# Allegro board PMOD2BNC.brd
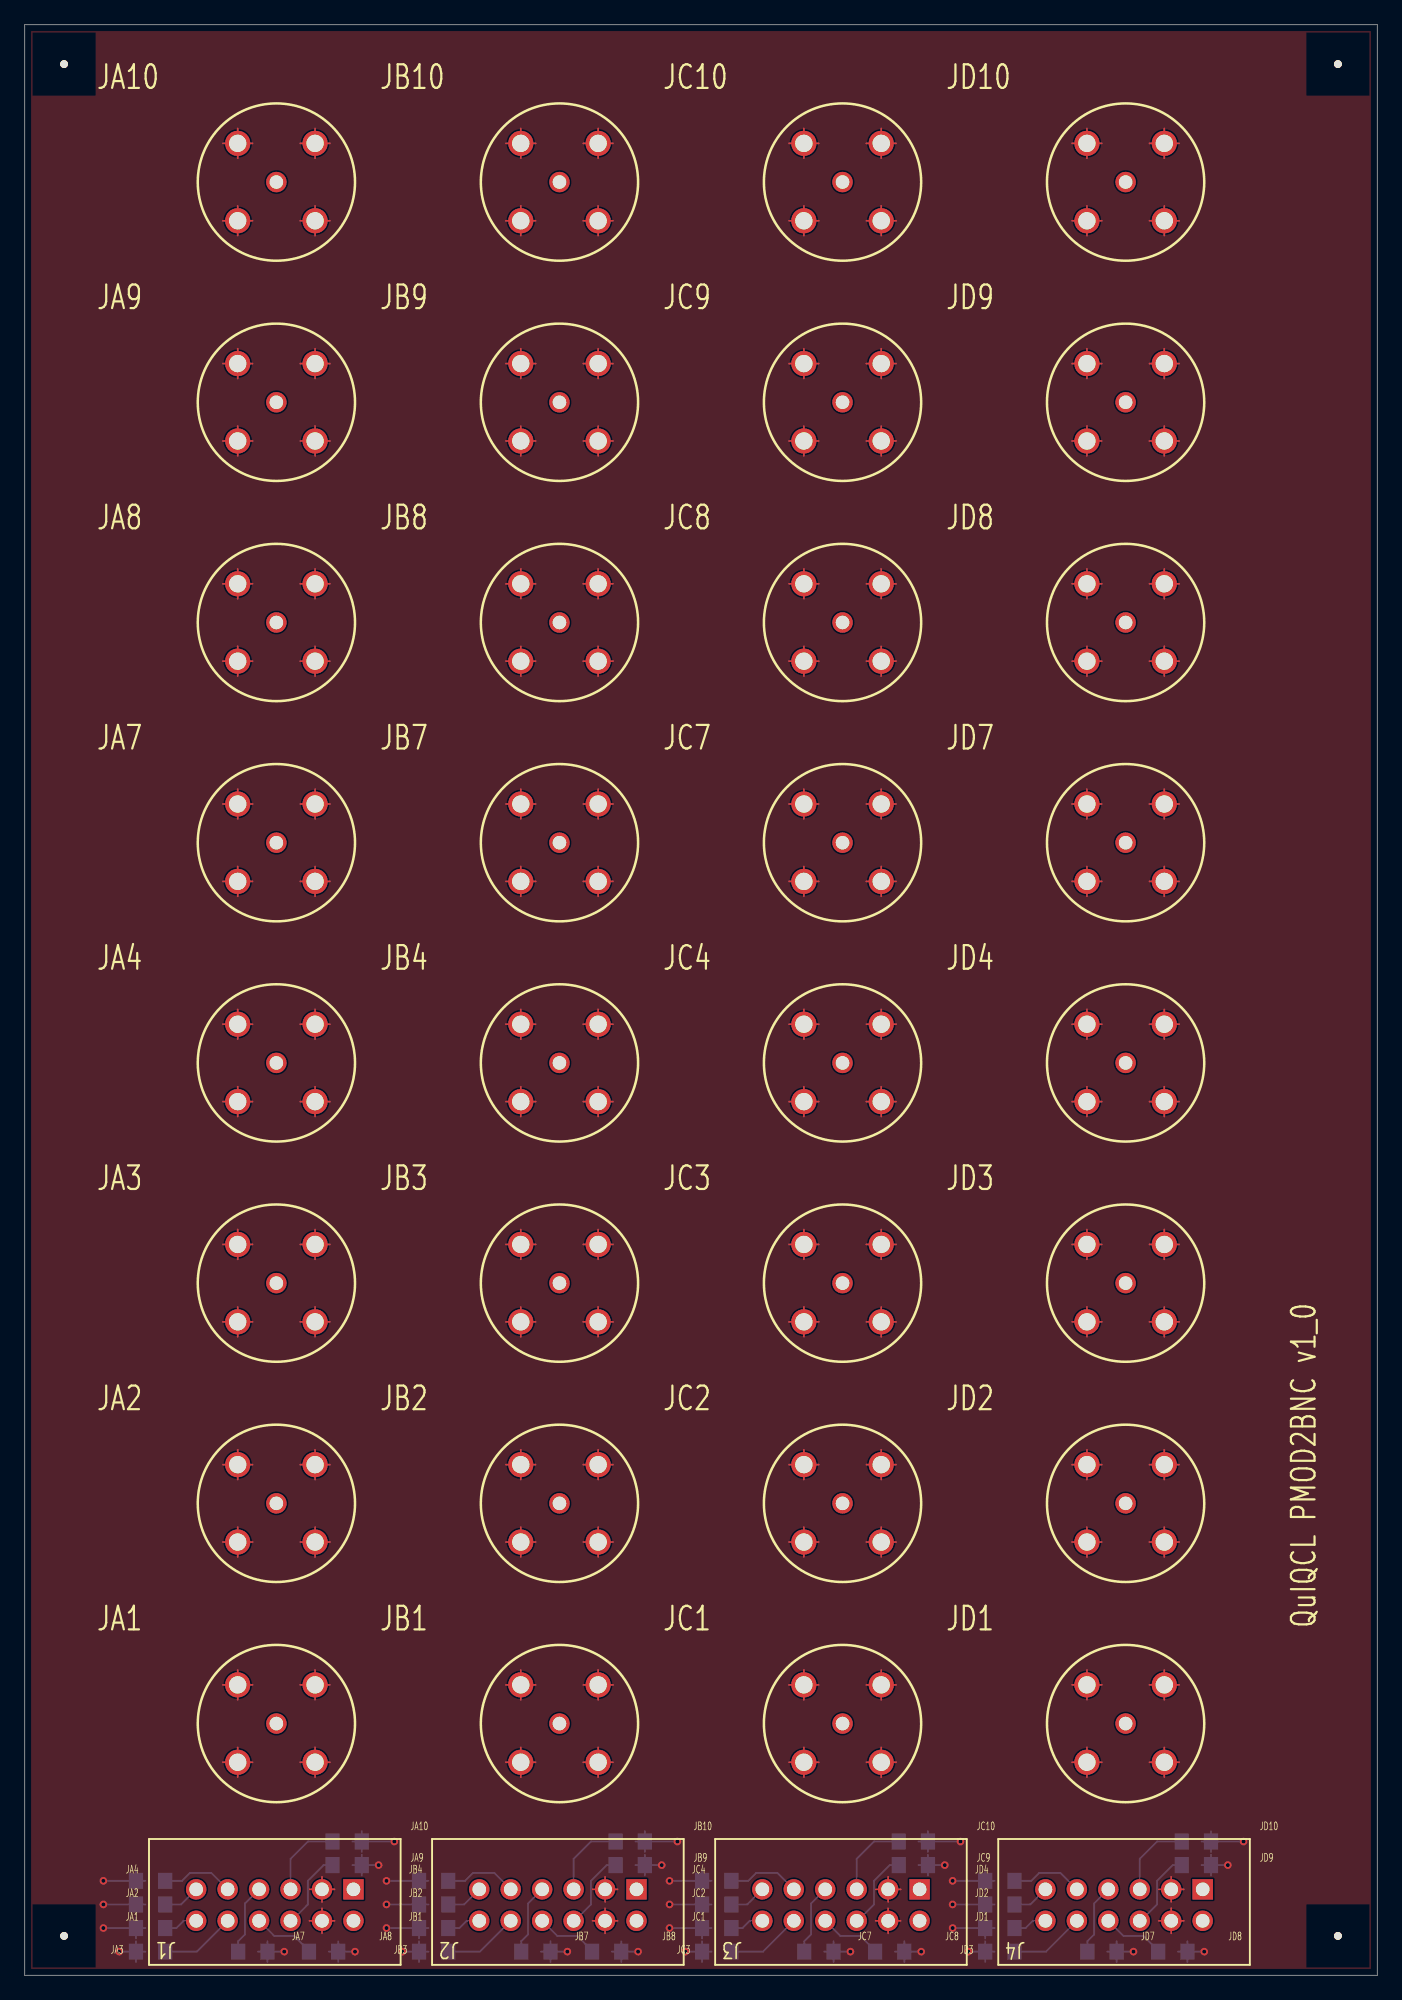
[diagram p0: board, top side]
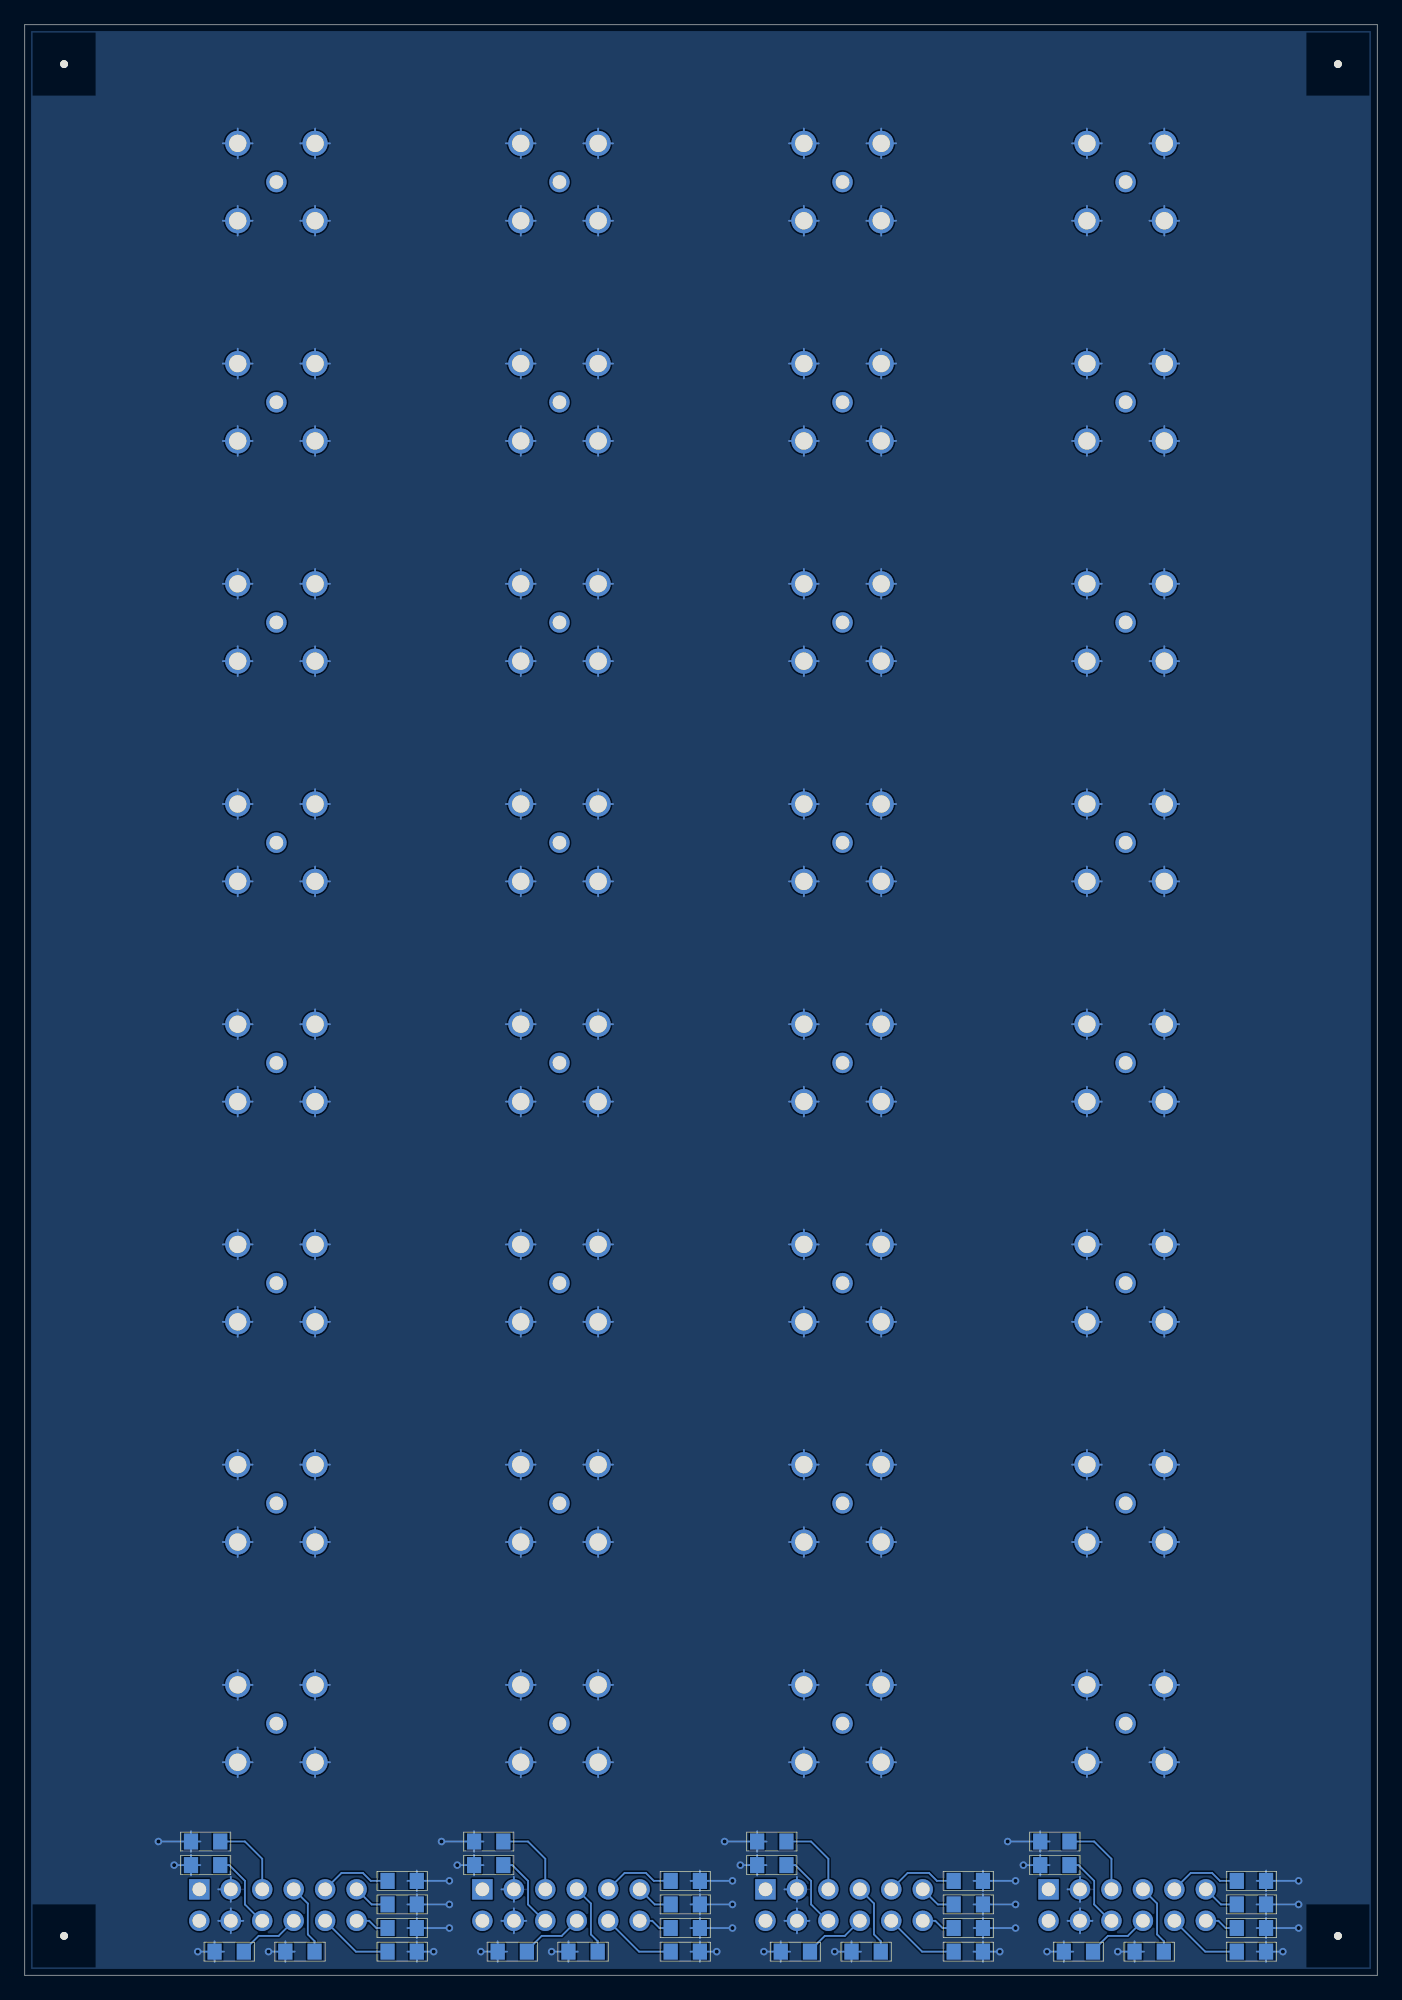
[diagram p1: board, bottom side, seen from below]

Outline 109.22 x 157.48 mm; copper layers: TOP, SIGNAL, GND, BOTTOM. Coordinates in mm from the lower left corner of the outline.
Outline path: 0,157.48 109.22,157.48 109.22,0 0,0 0,157.48

## Design rules (mm)
constraint set DEFAULT: min track width 0.127

## Placement (name value [footprint] x y rotation side)
BNC1  -  [MP-13-22-1]  20.32 20.32 0 top
BNC2  -  [MP-13-22-1]  20.32 38.1 0 top
BNC3  -  [MP-13-22-1]  20.32 55.88 0 top
BNC4  -  [MP-13-22-1]  20.32 73.66 0 top
BNC5  -  [MP-13-22-1]  20.32 91.44 0 top
BNC6  -  [MP-13-22-1]  20.32 109.22 0 top
BNC7  -  [MP-13-22-1]  20.32 127 0 top
BNC8  -  [MP-13-22-1]  20.32 144.78 0 top
BNC9  -  [MP-13-22-1]  43.18 20.32 0 top
BNC10  -  [MP-13-22-1]  43.18 38.1 0 top
BNC11  -  [MP-13-22-1]  43.18 55.88 0 top
BNC12  -  [MP-13-22-1]  43.18 73.66 0 top
BNC13  -  [MP-13-22-1]  43.18 91.44 0 top
BNC14  -  [MP-13-22-1]  43.18 109.22 0 top
BNC15  -  [MP-13-22-1]  43.18 127 0 top
BNC16  -  [MP-13-22-1]  43.18 144.78 0 top
BNC17  -  [MP-13-22-1]  66.04 20.32 0 top
BNC18  -  [MP-13-22-1]  66.04 38.1 0 top
BNC19  -  [MP-13-22-1]  66.04 55.88 0 top
BNC20  -  [MP-13-22-1]  66.04 73.66 0 top
BNC21  -  [MP-13-22-1]  66.04 91.44 0 top
BNC22  -  [MP-13-22-1]  66.04 109.22 0 top
BNC23  -  [MP-13-22-1]  66.04 127 0 top
BNC24  -  [MP-13-22-1]  66.04 144.78 0 top
BNC25  -  [MP-13-22-1]  88.9 20.32 0 top
BNC26  -  [MP-13-22-1]  88.9 38.1 0 top
BNC27  -  [MP-13-22-1]  88.9 55.88 0 top
BNC28  -  [MP-13-22-1]  88.9 73.66 0 top
BNC29  -  [MP-13-22-1]  88.9 91.44 0 top
BNC30  -  [MP-13-22-1]  88.9 109.22 0 top
BNC31  -  [MP-13-22-1]  88.9 127 0 top
BNC32  -  [MP-13-22-1]  88.9 144.78 0 top
J1  71764_0114  [717640112]  10.03 0.84 180 top
J2  71764_0114  [717640112]  32.89 0.84 180 top
J3  71764_0114  [717640112]  55.75 0.84 180 top
J4  71764_0114  [717640112]  78.61 0.84 180 top
NOREF  -  [unnamed]  106.05 3.17 0 top
NOREF#2  -  [unnamed]  106.05 154.31 0 top
NOREF#3  -  [unnamed]  3.17 3.17 0 top
NOREF#4  -  [unnamed]  3.17 154.31 0 top
R1  -  [RES_0805]  10.16 3.81 180 bottom
R2  -  [RES_0805]  10.16 5.71 180 bottom
R3  -  [RES_0805]  10.16 1.91 180 bottom
R4  -  [RES_0805]  10.16 7.62 180 bottom
R5  -  [RES_0805]  18.41 1.91 0 bottom
R6  -  [RES_0805]  24.13 1.91 0 bottom
R7  -  [RES_0805]  26.04 8.89 0 bottom
R8  -  [RES_0805]  26.04 10.79 0 bottom
R9  -  [RES_0805]  33.02 3.81 180 bottom
R10  -  [RES_0805]  33.02 5.71 180 bottom
R11  -  [RES_0805]  33.02 1.91 180 bottom
R12  -  [RES_0805]  33.02 7.62 180 bottom
R13  -  [RES_0805]  41.27 1.91 0 bottom
R14  -  [RES_0805]  46.99 1.91 0 bottom
R15  -  [RES_0805]  48.9 8.89 0 bottom
R16  -  [RES_0805]  48.9 10.79 0 bottom
R17  -  [RES_0805]  55.88 3.81 180 bottom
R18  -  [RES_0805]  55.88 5.71 180 bottom
R19  -  [RES_0805]  55.88 1.91 180 bottom
R20  -  [RES_0805]  55.88 7.62 180 bottom
R21  -  [RES_0805]  64.14 1.91 0 bottom
R22  -  [RES_0805]  69.85 1.91 0 bottom
R23  -  [RES_0805]  71.75 8.89 0 bottom
R24  -  [RES_0805]  71.75 10.79 0 bottom
R25  -  [RES_0805]  78.74 3.81 180 bottom
R26  -  [RES_0805]  78.74 5.71 180 bottom
R27  -  [RES_0805]  78.74 1.91 180 bottom
R28  -  [RES_0805]  78.74 7.62 180 bottom
R29  -  [RES_0805]  87 1.91 0 bottom
R30  -  [RES_0805]  92.71 1.91 0 bottom
R31  -  [RES_0805]  94.61 8.89 0 bottom
R32  -  [RES_0805]  94.61 10.79 0 bottom

## Library data of the parts
BNC1-BNC32 = MP-13-22-1
J1-J4 = 71764_0114
R1-R7 R9-R32 = RES_0805
R8 = RES_0805: signal model: R50_withpkg

## Footprints (pads in the part's own frame, mm; a bottom-side part is the same pattern mirrored in y, then rotated)
717640112
  rect 1.651x1.651 hole 1.1: 1(-16.51,-6.096)
  round 1.651 hole 1.1: 2(-16.51,-3.556) 3(-13.97,-6.096) 4(-13.97,-3.556) 5(-11.43,-6.096) 6(-11.43,-3.556) 7(-8.89,-6.096) 8(-8.89,-3.556) 9(-6.35,-6.096) 10(-6.35,-3.556) 11(-3.81,-6.096) 12(-3.81,-3.556)
MP-13-22-1
  round 2.032 hole 1.397: 1(3.124,3.124) 2(3.124,-3.124) 3(-3.124,-3.124) 4(-3.124,3.124)
  round 1.651 hole 1.092: 5(0,0)
RES_0805
  rect 1.151x1.3 smd: 1(1.181,0) 2(-1.181,0)
unnamed
  round 0.635 hole 3.175 unplated: (0,0)

## Nets
GND: BNC1.1 BNC1.2 BNC1.3 BNC1.4 BNC2.1 BNC2.2 BNC2.3 BNC2.4 BNC3.1 BNC3.2 BNC3.3 BNC3.4 BNC4.1 BNC4.2 BNC4.3 BNC4.4 BNC5.1 BNC5.2 BNC5.3 BNC5.4 BNC6.1 BNC6.2 BNC6.3 BNC6.4 BNC7.1 BNC7.2 BNC7.3 BNC7.4 BNC8.1 BNC8.2 BNC8.3 BNC8.4 BNC9.1 BNC9.2 BNC9.3 BNC9.4 BNC10.1 BNC10.2 BNC10.3 BNC10.4 BNC11.1 BNC11.2 BNC11.3 BNC11.4 BNC12.1 BNC12.2 BNC12.3 BNC12.4 BNC13.1 BNC13.2 BNC13.3 BNC13.4 BNC14.1 BNC14.2 BNC14.3 BNC14.4 BNC15.1 BNC15.2 BNC15.3 BNC15.4 BNC16.1 BNC16.2 BNC16.3 BNC16.4 BNC17.1 BNC17.2 BNC17.3 BNC17.4 BNC18.1 BNC18.2 BNC18.3 BNC18.4 BNC19.1 BNC19.2 BNC19.3 BNC19.4 BNC20.1 BNC20.2 BNC20.3 BNC20.4 BNC21.1 BNC21.2 BNC21.3 BNC21.4 BNC22.1 BNC22.2 BNC22.3 BNC22.4 BNC23.1 BNC23.2 BNC23.3 BNC23.4 BNC24.1 BNC24.2 BNC24.3 BNC24.4 BNC25.1 BNC25.2 BNC25.3 BNC25.4 BNC26.1 BNC26.2 BNC26.3 BNC26.4 BNC27.1 BNC27.2 BNC27.3 BNC27.4 BNC28.1 BNC28.2 BNC28.3 BNC28.4 BNC29.1 BNC29.2 BNC29.3 BNC29.4 BNC30.1 BNC30.2 BNC30.3 BNC30.4 BNC31.1 BNC31.2 BNC31.3 BNC31.4 BNC32.1 BNC32.2 BNC32.3 BNC32.4 J1.3 J1.4 J2.3 J2.4 J3.3 J3.4 J4.3 J4.4 R1.1 R2.1 R3.1 R4.1 R5.1 R6.1 R7.1 R8.1 R9.1 R10.1 R11.1 R12.1 R13.1 R14.1 R15.1 R16.1 R17.1 R18.1 R19.1 R20.1 R21.1 R22.1 R23.1 R24.1 R25.1 R26.1 R27.1 R28.1 R29.1 R30.1 R31.1 R32.1
N08480: BNC1.5(IO) J1.12 R1.2
N08489: BNC2.5(IO) J1.10 R3.2
N08507: BNC3.5(IO) J1.7 R5.2
N08519: BNC4.5(IO) J1.6 R7.2
N08544: BNC5.5(IO) J1.11 R2.2
N08556: BNC6.5(IO) J1.9 R4.2
N08588: BNC7.5(IO) J1.8 R6.2
N08600: BNC8.5(IO) J1.5 R8.2
N13592: BNC9.5(IO) J2.12 R9.2
N13596: BNC10.5(IO) J2.10 R11.2
N13604: BNC11.5(IO) J2.7 R13.2
N13610: BNC12.5(IO) J2.6 R15.2
N13620: BNC13.5(IO) J2.11 R10.2
N13626: BNC14.5(IO) J2.9 R12.2
N13636: BNC15.5(IO) J2.8 R14.2
N13642: BNC16.5(IO) J2.5 R16.2
N14473: BNC17.5(IO) J3.12 R17.2
N14477: BNC18.5(IO) J3.10 R19.2
N14485: BNC19.5(IO) J3.7 R21.2
N14491: BNC20.5(IO) J3.6 R23.2
N14501: BNC21.5(IO) J3.11 R18.2
N14507: BNC22.5(IO) J3.9 R20.2
N14517: BNC23.5(IO) J3.8 R22.2
N14523: BNC24.5(IO) J3.5 R24.2
N15354: BNC25.5(IO) J4.12 R25.2
N15358: BNC26.5(IO) J4.10 R27.2
N15366: BNC27.5(IO) J4.7 R29.2
N15372: BNC28.5(IO) J4.6 R31.2
N15382: BNC29.5(IO) J4.11 R26.2
N15388: BNC30.5(IO) J4.9 R28.2
N15398: BNC31.5(IO) J4.8 R30.2
N15404: BNC32.5(IO) J4.5 R32.2

Pads without a net: J1 1 2; J2 1 2; J3 1 2; J4 1 2

## Via types
v1: diameter 0.61, hole 0.33, TOP to BOTTOM, 32 vias

## Routing (per net, layer and track width the routed paths; a pad name or vN(x,y) marks a point on that pad's centre or on a via; arc(x,y) is an arc through that point)
GND: length 2075.7
  TOP w0.127: 90.83,52.76 BNC27.2 ; BNC27.2 93.22,52.76 ; BNC27.2 92.02,53.95 ; BNC27.2 92.02,51.56 ; BNC32.4 86.97,147.9 ; BNC32.4 84.58,147.9 ; BNC32.4 85.78,146.71 ; BNC32.4 85.78,149.1 ; 61.72,76.78 BNC20.4 ; BNC20.4 62.92,77.98 ; BNC20.4 62.92,75.59 ; BNC20.4 64.11,76.78 ; 16,141.66 BNC8.3 ; BNC8.3 17.2,140.46 ; BNC8.3 17.2,142.85 ; BNC8.3 18.39,141.66 ; 38.86,123.88 BNC15.3 ; BNC15.3 41.25,123.88 ; BNC15.3 40.06,122.68 ; BNC15.3 40.06,125.07 ; 69.72,5.93 J3.3 ; J3.3 68.71,6.93 ; J3.3 70.73,6.93 ; J3.3 69.72,7.94 ; 23.44,22.25 BNC1.1 ; BNC1.1 23.44,24.64 ; BNC1.1 24.64,23.44 ; BNC1.1 22.25,23.44 ; 61.72,52.76 BNC19.3 ; BNC19.3 64.11,52.76 ; BNC19.3 62.92,53.95 ; BNC19.3 62.92,51.56 ; 45.11,23.44 BNC9.1 ; BNC9.1 47.5,23.44 ; BNC9.1 46.3,22.25 ; BNC9.1 46.3,24.64 ; 69.72,3.39 J3.4 ; J3.4 70.73,4.39 ; J3.4 68.71,4.39 ; J3.4 69.72,5.4 ; 92.02,40.03 BNC26.1 ; BNC26.1 90.83,41.22 ; BNC26.1 93.22,41.22 ; BNC26.1 92.02,42.42 ; BNC24.2 69.16,142.85 ; BNC24.2 69.16,140.46 ; BNC24.2 70.36,141.66 ; BNC24.2 67.97,141.66 ; BNC32.3 85.78,142.85 ; BNC32.3 86.97,141.66 ; BNC32.3 84.58,141.66 ; BNC32.3 85.78,140.46 ; 69.16,40.03 BNC18.1 ; BNC18.1 69.16,42.42 ; BNC18.1 70.36,41.22 ; BNC18.1 67.97,41.22 ; BNC2.4 17.2,42.42 ; BNC2.4 18.39,41.22 ; BNC2.4 17.2,40.03 ; BNC2.4 16,41.22 ; 46.86,3.39 J2.4 ; J2.4 47.87,4.39 ; J2.4 45.85,4.39 ; J2.4 46.86,5.4 ; 90.83,106.1 BNC30.2 ; BNC30.2 92.02,107.29 ; BNC30.2 93.22,106.1 ; BNC30.2 92.02,104.9 ; BNC29.2 93.22,88.32 ; BNC29.2 92.02,89.51 ; BNC29.2 92.02,87.12 ; BNC29.2 90.83,88.32 ; BNC2.1 23.44,42.42 ; BNC2.1 23.44,40.03 ; BNC2.1 22.25,41.22 ; BNC2.1 24.64,41.22 ; 62.92,87.12 BNC21.3 ; BNC21.3 64.11,88.32 ; BNC21.3 61.72,88.32 ; BNC21.3 62.92,89.51 ; BNC20.3 64.11,70.54 ; BNC20.3 61.72,70.54 ; BNC20.3 62.92,71.73 ; BNC20.3 62.92,69.34 ; BNC14.4 41.25,112.34 ; BNC14.4 40.06,113.54 ; BNC14.4 38.86,112.34 ; BNC14.4 40.06,111.15 ; BNC31.3 85.78,125.07 ; BNC31.3 86.97,123.88 ; BNC31.3 84.58,123.88 ; BNC31.3 85.78,122.68 ; 61.72,94.56 BNC21.4 ; BNC21.4 62.92,93.37 ; BNC21.4 64.11,94.56 ; BNC21.4 62.92,95.76 ; BNC22.4 64.11,112.34 ; BNC22.4 61.72,112.34 ; BNC22.4 62.92,111.15 ; BNC22.4 62.92,113.54 ; BNC11.3 40.06,53.95 ; BNC11.3 40.06,51.56 ; BNC11.3 41.25,52.76 ; BNC11.3 38.86,52.76 ; 23.44,16 BNC1.2 ; BNC1.2 24.64,17.2 ; BNC1.2 22.25,17.2 ; BNC1.2 23.44,18.39 ; J1.4 25.01,4.39 ; J1.4 24,5.4 ; J1.4 24,3.39 ; J1.4 22.99,4.39 ; BNC21.2 70.36,88.32 ; BNC21.2 69.16,89.51 ; BNC21.2 69.16,87.12 ; BNC21.2 67.97,88.32 ; 62.92,104.9 BNC22.3 ; BNC22.3 61.72,106.1 ; BNC22.3 64.11,106.1 ; BNC22.3 62.92,107.29 ; 45.11,59 BNC11.1 ; BNC11.1 46.3,60.2 ; BNC11.1 47.5,59 ; BNC11.1 46.3,57.81 ; 85.78,75.59 BNC28.4 ; BNC28.4 86.97,76.78 ; BNC28.4 84.58,76.78 ; BNC28.4 85.78,77.98 ; 40.06,146.71 BNC16.4 ; BNC16.4 41.25,147.9 ; BNC16.4 38.86,147.9 ; BNC16.4 40.06,149.1 ; BNC11.2 46.3,53.95 ; BNC11.2 47.5,52.76 ; BNC11.2 46.3,51.56 ; BNC11.2 45.11,52.76 ; 85.78,104.9 BNC30.3 ; BNC30.3 85.78,107.29 ; BNC30.3 86.97,106.1 ; BNC30.3 84.58,106.1 ; BNC9.2 47.5,17.2 ; BNC9.2 45.11,17.2 ; BNC9.2 46.3,16 ; BNC9.2 46.3,18.39 ; 16,112.34 BNC6.4 ; BNC6.4 17.2,113.54 ; BNC6.4 18.39,112.34 ; BNC6.4 17.2,111.15 ; BNC25.4 85.78,24.64 ; BNC25.4 86.97,23.44 ; BNC25.4 85.78,22.25 ; BNC25.4 84.58,23.44 ; 17.2,16 BNC1.3 ; BNC1.3 16,17.2 ; BNC1.3 17.2,18.39 ; BNC1.3 18.39,17.2 ; 92.02,75.59 BNC28.1 ; BNC28.1 92.02,77.98 ; BNC28.1 90.83,76.78 ; BNC28.1 93.22,76.78 ; 22.25,34.98 BNC2.2 ; BNC2.2 23.44,33.78 ; BNC2.2 24.64,34.98 ; BNC2.2 23.44,36.17 ; BNC29.3 85.78,89.51 ; BNC29.3 84.58,88.32 ; BNC29.3 85.78,87.12 ; BNC29.3 86.97,88.32 ; 62.92,16 BNC17.3 ; BNC17.3 61.72,17.2 ; BNC17.3 64.11,17.2 ; BNC17.3 62.92,18.39 ; J2.3 46.86,7.94 ; J2.3 45.85,6.93 ; J2.3 47.87,6.93 ; J2.3 46.86,5.93 ; 40.06,33.78 BNC10.3 ; BNC10.3 40.06,36.17 ; BNC10.3 38.86,34.98 ; BNC10.3 41.25,34.98 ; BNC25.2 93.22,17.2 ; BNC25.2 92.02,16 ; BNC25.2 92.02,18.39 ; BNC25.2 90.83,17.2 ; 84.58,59 BNC27.4 ; BNC27.4 85.78,57.81 ; BNC27.4 86.97,59 ; BNC27.4 85.78,60.2 ; BNC23.3 62.92,125.07 ; BNC23.3 62.92,122.68 ; BNC23.3 64.11,123.88 ; BNC23.3 61.72,123.88 ; BNC8.2 23.44,142.85 ; BNC8.2 24.64,141.66 ; BNC8.2 22.25,141.66 ; BNC8.2 23.44,140.46 ; BNC24.1 70.36,147.9 ; BNC24.1 69.16,146.71 ; BNC24.1 69.16,149.1 ; BNC24.1 67.97,147.9 ; BNC32.1 93.22,147.9 ; BNC32.1 90.83,147.9 ; BNC32.1 92.02,149.1 ; BNC32.1 92.02,146.71 ; BNC26.2 93.22,34.98 ; BNC26.2 92.02,36.17 ; BNC26.2 90.83,34.98 ; BNC26.2 92.02,33.78 ; 84.58,130.12 BNC31.4 ; BNC31.4 85.78,131.32 ; BNC31.4 86.97,130.12 ; BNC31.4 85.78,128.93 ; 61.72,147.9 BNC24.4 ; BNC24.4 62.92,146.71 ; BNC24.4 62.92,149.1 ; BNC24.4 64.11,147.9 ; BNC9.4 41.25,23.44 ; BNC9.4 40.06,24.64 ; BNC9.4 40.06,22.25 ; BNC9.4 38.86,23.44 ; 23.44,57.81 BNC3.1 ; BNC3.1 23.44,60.2 ; BNC3.1 24.64,59 ; BNC3.1 22.25,59 ; 16,52.76 BNC3.3 ; BNC3.3 17.2,51.56 ; BNC3.3 17.2,53.95 ; BNC3.3 18.39,52.76 ; 92.02,122.68 BNC31.2 ; BNC31.2 90.83,123.88 ; BNC31.2 92.02,125.07 ; BNC31.2 93.22,123.88 ; BNC8.1 24.64,147.9 ; BNC8.1 23.44,146.71 ; BNC8.1 22.25,147.9 ; BNC8.1 23.44,149.1 ; 22.25,94.56 BNC5.1 ; BNC5.1 24.64,94.56 ; BNC5.1 23.44,93.37 ; BNC5.1 23.44,95.76 ; 40.06,93.37 BNC13.4 ; BNC13.4 38.86,94.56 ; BNC13.4 40.06,95.76 ; BNC13.4 41.25,94.56 ; BNC7.2 24.64,123.88 ; BNC7.2 22.25,123.88 ; BNC7.2 23.44,125.07 ; BNC7.2 23.44,122.68 ; 22.25,106.1 BNC6.2 ; BNC6.2 24.64,106.1 ; BNC6.2 23.44,104.9 ; BNC6.2 23.44,107.29 ; 61.72,34.98 BNC18.3 ; BNC18.3 62.92,33.78 ; BNC18.3 62.92,36.17 ; BNC18.3 64.11,34.98 ; BNC6.1 24.64,112.34 ; BNC6.1 22.25,112.34 ; BNC6.1 23.44,111.15 ; BNC6.1 23.44,113.54 ; 40.06,140.46 BNC16.3 ; BNC16.3 38.86,141.66 ; BNC16.3 41.25,141.66 ; BNC16.3 40.06,142.85 ; BNC10.4 41.25,41.22 ; BNC10.4 38.86,41.22 ; BNC10.4 40.06,40.03 ; BNC10.4 40.06,42.42 ; BNC18.4 62.92,42.42 ; BNC18.4 64.11,41.22 ; BNC18.4 62.92,40.03 ; BNC18.4 61.72,41.22 ; 45.11,41.22 BNC10.1 ; BNC10.1 46.3,40.03 ; BNC10.1 47.5,41.22 ; BNC10.1 46.3,42.42 ; 45.11,112.34 BNC14.1 ; BNC14.1 47.5,112.34 ; BNC14.1 46.3,111.15 ; BNC14.1 46.3,113.54 ; 46.3,75.59 BNC12.1 ; BNC12.1 46.3,77.98 ; BNC12.1 45.11,76.78 ; BNC12.1 47.5,76.78 ; BNC5.2 23.44,89.51 ; BNC5.2 24.64,88.32 ; BNC5.2 23.44,87.12 ; BNC5.2 22.25,88.32 ; BNC9.3 40.06,18.39 ; BNC9.3 40.06,16 ; BNC9.3 38.86,17.2 ; BNC9.3 41.25,17.2 ; BNC18.2 69.16,36.17 ; BNC18.2 67.97,34.98 ; BNC18.2 69.16,33.78 ; BNC18.2 70.36,34.98 ; 67.97,130.12 BNC23.1 ; BNC23.1 70.36,130.12 ; BNC23.1 69.16,131.32 ; BNC23.1 69.16,128.93 ; BNC20.2 70.36,70.54 ; BNC20.2 69.16,69.34 ; BNC20.2 67.97,70.54 ; BNC20.2 69.16,71.73 ; BNC16.2 46.3,142.85 ; BNC16.2 47.5,141.66 ; BNC16.2 45.11,141.66 ; BNC16.2 46.3,140.46 ; 40.06,69.34 BNC12.3 ; BNC12.3 40.06,71.73 ; BNC12.3 38.86,70.54 ; BNC12.3 41.25,70.54 ; 45.11,94.56 BNC13.1 ; BNC13.1 47.5,94.56 ; BNC13.1 46.3,95.76 ; BNC13.1 46.3,93.37 ; 91.57,6.93 J4.3 ; J4.3 92.58,5.93 ; J4.3 93.59,6.93 ; J4.3 92.58,7.94 ; 45.11,123.88 BNC15.2 ; BNC15.2 46.3,122.68 ; BNC15.2 47.5,123.88 ; BNC15.2 46.3,125.07 ; BNC4.3 17.2,71.73 ; BNC4.3 17.2,69.34 ; BNC4.3 16,70.54 ; BNC4.3 18.39,70.54 ; 90.83,59 BNC27.1 ; BNC27.1 93.22,59 ; BNC27.1 92.02,57.81 ; BNC27.1 92.02,60.2 ; 61.72,59 BNC19.4 ; BNC19.4 62.92,60.2 ; BNC19.4 62.92,57.81 ; BNC19.4 64.11,59 ; BNC24.3 62.92,142.85 ; BNC24.3 64.11,141.66 ; BNC24.3 61.72,141.66 ; BNC24.3 62.92,140.46 ; BNC26.3 85.78,36.17 ; BNC26.3 84.58,34.98 ; BNC26.3 85.78,33.78 ; BNC26.3 86.97,34.98 ; 22.25,70.54 BNC4.2 ; BNC4.2 24.64,70.54 ; BNC4.2 23.44,71.73 ; BNC4.2 23.44,69.34 ; BNC14.3 40.06,107.29 ; BNC14.3 40.06,104.9 ; BNC14.3 38.86,106.1 ; BNC14.3 41.25,106.1 ; BNC31.1 92.02,131.32 ; BNC31.1 93.22,130.12 ; BNC31.1 90.83,130.12 ; BNC31.1 92.02,128.93 ; BNC13.2 46.3,89.51 ; BNC13.2 46.3,87.12 ; BNC13.2 45.11,88.32 ; BNC13.2 47.5,88.32 ; 40.06,57.81 BNC11.4 ; BNC11.4 38.86,59 ; BNC11.4 41.25,59 ; BNC11.4 40.06,60.2 ; 46.3,104.9 BNC14.2 ; BNC14.2 45.11,106.1 ; BNC14.2 46.3,107.29 ; BNC14.2 47.5,106.1 ; BNC8.4 18.39,147.9 ; BNC8.4 17.2,146.71 ; BNC8.4 16,147.9 ; BNC8.4 17.2,149.1 ; BNC23.2 70.36,123.88 ; BNC23.2 69.16,125.07 ; BNC23.2 69.16,122.68 ; BNC23.2 67.97,123.88 ; J4.4 93.59,4.39 ; J4.4 92.58,5.4 ; J4.4 92.58,3.39 ; J4.4 91.57,4.39 ; 69.16,16 BNC17.2 ; BNC17.2 70.36,17.2 ; BNC17.2 67.97,17.2 ; BNC17.2 69.16,18.39 ; BNC19.2 69.16,53.95 ; BNC19.2 70.36,52.76 ; BNC19.2 69.16,51.56 ; BNC19.2 67.97,52.76 ; 69.16,75.59 BNC20.1 ; BNC20.1 67.97,76.78 ; BNC20.1 70.36,76.78 ; BNC20.1 69.16,77.98 ; BNC32.2 92.02,142.85 ; BNC32.2 93.22,141.66 ; BNC32.2 90.83,141.66 ; BNC32.2 92.02,140.46 ; 69.16,93.37 BNC21.1 ; BNC21.1 67.97,94.56 ; BNC21.1 70.36,94.56 ; BNC21.1 69.16,95.76 ; BNC19.1 69.16,60.2 ; BNC19.1 69.16,57.81 ; BNC19.1 70.36,59 ; BNC19.1 67.97,59 ; BNC28.3 85.78,71.73 ; BNC28.3 84.58,70.54 ; BNC28.3 85.78,69.34 ; BNC28.3 86.97,70.54 ; BNC13.3 40.06,89.51 ; BNC13.3 41.25,88.32 ; BNC13.3 40.06,87.12 ; BNC13.3 38.86,88.32 ; 85.78,93.37 BNC29.4 ; BNC29.4 86.97,94.56 ; BNC29.4 85.78,95.76 ; BNC29.4 84.58,94.56 ; J1.3 24,7.94 ; J1.3 25.01,6.93 ; J1.3 24,5.93 ; J1.3 22.99,6.93 ; 84.58,41.22 BNC26.4 ; BNC26.4 86.97,41.22 ; BNC26.4 85.78,40.03 ; BNC26.4 85.78,42.42 ; BNC12.4 41.25,76.78 ; BNC12.4 40.06,77.98 ; BNC12.4 40.06,75.59 ; BNC12.4 38.86,76.78 ; BNC5.4 17.2,95.76 ; BNC5.4 16,94.56 ; BNC5.4 18.39,94.56 ; BNC5.4 17.2,93.37 ; 46.3,146.71 BNC16.1 ; BNC16.1 47.5,147.9 ; BNC16.1 46.3,149.1 ; BNC16.1 45.11,147.9 ; BNC7.3 18.39,123.88 ; BNC7.3 17.2,125.07 ; BNC7.3 16,123.88 ; BNC7.3 17.2,122.68 ; BNC25.1 92.02,24.64 ; BNC25.1 92.02,22.25 ; BNC25.1 90.83,23.44 ; BNC25.1 93.22,23.44 ; BNC29.1 92.02,95.76 ; BNC29.1 90.83,94.56 ; BNC29.1 92.02,93.37 ; BNC29.1 93.22,94.56 ; BNC15.4 41.25,130.12 ; BNC15.4 40.06,128.93 ; BNC15.4 40.06,131.32 ; BNC15.4 38.86,130.12 ; BNC30.4 86.97,112.34 ; BNC30.4 85.78,113.54 ; BNC30.4 84.58,112.34 ; BNC30.4 85.78,111.15 ; BNC4.1 23.44,77.98 ; BNC4.1 22.25,76.78 ; BNC4.1 23.44,75.59 ; BNC4.1 24.64,76.78 ; 85.78,16 BNC25.3 ; BNC25.3 85.78,18.39 ; BNC25.3 86.97,17.2 ; BNC25.3 84.58,17.2 ; BNC3.2 23.44,53.95 ; BNC3.2 22.25,52.76 ; BNC3.2 24.64,52.76 ; BNC3.2 23.44,51.56 ; 23.44,128.93 BNC7.1 ; BNC7.1 24.64,130.12 ; BNC7.1 22.25,130.12 ; BNC7.1 23.44,131.32 ; 17.2,33.78 BNC2.3 ; BNC2.3 17.2,36.17 ; BNC2.3 16,34.98 ; BNC2.3 18.39,34.98 ; BNC12.2 46.3,71.73 ; BNC12.2 45.11,70.54 ; BNC12.2 46.3,69.34 ; BNC12.2 47.5,70.54 ; 67.97,112.34 BNC22.1 ; BNC22.1 70.36,112.34 ; BNC22.1 69.16,113.54 ; BNC22.1 69.16,111.15 ; 16,130.12 BNC7.4 ; BNC7.4 18.39,130.12 ; BNC7.4 17.2,128.93 ; BNC7.4 17.2,131.32 ; BNC1.4 18.39,23.44 ; BNC1.4 17.2,22.25 ; BNC1.4 16,23.44 ; BNC1.4 17.2,24.64 ; 69.16,22.25 BNC17.1 ; BNC17.1 67.97,23.44 ; BNC17.1 69.16,24.64 ; BNC17.1 70.36,23.44 ; 16,59 BNC3.4 ; BNC3.4 17.2,60.2 ; BNC3.4 17.2,57.81 ; BNC3.4 18.39,59 ; BNC15.1 47.5,130.12 ; BNC15.1 45.11,130.12 ; BNC15.1 46.3,128.93 ; BNC15.1 46.3,131.32 ; BNC22.2 70.36,106.1 ; BNC22.2 69.16,107.29 ; BNC22.2 69.16,104.9 ; BNC22.2 67.97,106.1 ; 62.92,128.93 BNC23.4 ; BNC23.4 61.72,130.12 ; BNC23.4 64.11,130.12 ; BNC23.4 62.92,131.32 ; 62.92,22.25 BNC17.4 ; BNC17.4 64.11,23.44 ; BNC17.4 62.92,24.64 ; BNC17.4 61.72,23.44 ; BNC28.2 93.22,70.54 ; BNC28.2 92.02,69.34 ; BNC28.2 90.83,70.54 ; BNC28.2 92.02,71.73 ; 45.11,34.98 BNC10.2 ; BNC10.2 46.3,36.17 ; BNC10.2 46.3,33.78 ; BNC10.2 47.5,34.98 ; BNC4.4 17.2,77.98 ; BNC4.4 16,76.78 ; BNC4.4 17.2,75.59 ; BNC4.4 18.39,76.78 ; 17.2,104.9 BNC6.3 ; BNC6.3 16,106.1 ; BNC6.3 17.2,107.29 ; BNC6.3 18.39,106.1 ; 84.58,52.76 BNC27.3 ; BNC27.3 85.78,51.56 ; BNC27.3 86.97,52.76 ; BNC27.3 85.78,53.95 ; 16,88.32 BNC5.3 ; BNC5.3 17.2,87.12 ; BNC5.3 17.2,89.51 ; BNC5.3 18.39,88.32 ; 90.83,112.34 BNC30.1 ; BNC30.1 93.22,112.34 ; BNC30.1 92.02,113.54 ; BNC30.1 92.02,111.15
  GND w0.127: 23.44,122.68 BNC7.2 ; BNC7.2 24.64,123.88 ; BNC7.2 22.25,123.88 ; BNC7.2 23.44,125.07 ; BNC20.1 69.16,77.98 ; BNC20.1 69.16,75.59 ; BNC20.1 67.97,76.78 ; BNC20.1 70.36,76.78 ; BNC4.3 17.2,71.73 ; BNC4.3 18.39,70.54 ; BNC4.3 16,70.54 ; BNC4.3 17.2,69.34 ; 90.83,23.44 BNC25.1 ; BNC25.1 92.02,22.25 ; BNC25.1 93.22,23.44 ; BNC25.1 92.02,24.64 ; 62.92,22.25 BNC17.4 ; BNC17.4 64.11,23.44 ; BNC17.4 61.72,23.44 ; BNC17.4 62.92,24.64 ; 61.72,147.9 BNC24.4 ; BNC24.4 62.92,149.1 ; BNC24.4 64.11,147.9 ; BNC24.4 62.92,146.71 ; 61.72,112.34 BNC22.4 ; BNC22.4 62.92,113.54 ; BNC22.4 62.92,111.15 ; BNC22.4 64.11,112.34 ; 45.85,4.39 J2.4 ; J2.4 47.87,4.39 ; J2.4 46.86,5.4 ; J2.4 46.86,3.39 ; BNC22.1 69.16,113.54 ; BNC22.1 69.16,111.15 ; BNC22.1 70.36,112.34 ; BNC22.1 67.97,112.34 ; BNC17.3 64.11,17.2 ; BNC17.3 61.72,17.2 ; BNC17.3 62.92,18.39 ; BNC17.3 62.92,16 ; 22.25,52.76 BNC3.2 ; BNC3.2 23.44,51.56 ; BNC3.2 23.44,53.95 ; BNC3.2 24.64,52.76 ; 46.3,22.25 BNC9.1 ; BNC9.1 45.11,23.44 ; BNC9.1 46.3,24.64 ; BNC9.1 47.5,23.44 ; 23.44,22.25 BNC1.1 ; BNC1.1 22.25,23.44 ; BNC1.1 23.44,24.64 ; BNC1.1 24.64,23.44 ; BNC5.3 17.2,89.51 ; BNC5.3 18.39,88.32 ; BNC5.3 16,88.32 ; BNC5.3 17.2,87.12 ; BNC2.3 17.2,36.17 ; BNC2.3 18.39,34.98 ; BNC2.3 17.2,33.78 ; BNC2.3 16,34.98 ; BNC15.1 47.5,130.12 ; BNC15.1 45.11,130.12 ; BNC15.1 46.3,131.32 ; BNC15.1 46.3,128.93 ; BNC22.3 64.11,106.1 ; BNC22.3 62.92,104.9 ; BNC22.3 61.72,106.1 ; BNC22.3 62.92,107.29 ; 38.86,106.1 BNC14.3 ; BNC14.3 40.06,107.29 ; BNC14.3 41.25,106.1 ; BNC14.3 40.06,104.9 ; 16,17.2 BNC1.3 ; BNC1.3 17.2,16 ; BNC1.3 17.2,18.39 ; BNC1.3 18.39,17.2 ; 24,5.93 J1.3 ; J1.3 24,7.94 ; J1.3 25.01,6.93 ; J1.3 22.99,6.93 ; BNC29.3 86.97,88.32 ; BNC29.3 84.58,88.32 ; BNC29.3 85.78,89.51 ; BNC29.3 85.78,87.12 ; BNC10.2 47.5,34.98 ; BNC10.2 46.3,33.78 ; BNC10.2 46.3,36.17 ; BNC10.2 45.11,34.98 ; 67.97,141.66 BNC24.2 ; BNC24.2 70.36,141.66 ; BNC24.2 69.16,142.85 ; BNC24.2 69.16,140.46 ; 22.25,41.22 BNC2.1 ; BNC2.1 24.64,41.22 ; BNC2.1 23.44,40.03 ; BNC2.1 23.44,42.42 ; 92.02,75.59 BNC28.1 ; BNC28.1 93.22,76.78 ; BNC28.1 90.83,76.78 ; BNC28.1 92.02,77.98 ; BNC12.2 47.5,70.54 ; BNC12.2 45.11,70.54 ; BNC12.2 46.3,71.73 ; BNC12.2 46.3,69.34 ; BNC10.3 41.25,34.98 ; BNC10.3 38.86,34.98 ; BNC10.3 40.06,33.78 ; BNC10.3 40.06,36.17 ; 84.58,94.56 BNC29.4 ; BNC29.4 85.78,93.37 ; BNC29.4 85.78,95.76 ; BNC29.4 86.97,94.56 ; 40.06,111.15 BNC14.4 ; BNC14.4 40.06,113.54 ; BNC14.4 41.25,112.34 ; BNC14.4 38.86,112.34 ; 84.58,112.34 BNC30.4 ; BNC30.4 85.78,113.54 ; BNC30.4 86.97,112.34 ; BNC30.4 85.78,111.15 ; BNC15.3 41.25,123.88 ; BNC15.3 40.06,122.68 ; BNC15.3 40.06,125.07 ; BNC15.3 38.86,123.88 ; 45.11,106.1 BNC14.2 ; BNC14.2 46.3,104.9 ; BNC14.2 46.3,107.29 ; BNC14.2 47.5,106.1 ; BNC12.3 40.06,71.73 ; BNC12.3 38.86,70.54 ; BNC12.3 41.25,70.54 ; BNC12.3 40.06,69.34 ; 22.25,17.2 BNC1.2 ; BNC1.2 24.64,17.2 ; BNC1.2 23.44,18.39 ; BNC1.2 23.44,16 ; BNC18.1 69.16,42.42 ; BNC18.1 67.97,41.22 ; BNC18.1 69.16,40.03 ; BNC18.1 70.36,41.22 ; BNC19.3 64.11,52.76 ; BNC19.3 62.92,53.95 ; BNC19.3 62.92,51.56 ; BNC19.3 61.72,52.76 ; 22.25,112.34 BNC6.1 ; BNC6.1 23.44,111.15 ; BNC6.1 24.64,112.34 ; BNC6.1 23.44,113.54 ; 23.44,69.34 BNC4.2 ; BNC4.2 23.44,71.73 ; BNC4.2 22.25,70.54 ; BNC4.2 24.64,70.54 ; BNC19.2 70.36,52.76 ; BNC19.2 67.97,52.76 ; BNC19.2 69.16,51.56 ; BNC19.2 69.16,53.95 ; BNC27.2 93.22,52.76 ; BNC27.2 90.83,52.76 ; BNC27.2 92.02,53.95 ; BNC27.2 92.02,51.56 ; BNC26.2 92.02,36.17 ; BNC26.2 93.22,34.98 ; BNC26.2 92.02,33.78 ; BNC26.2 90.83,34.98 ; BNC21.4 62.92,95.76 ; BNC21.4 64.11,94.56 ; BNC21.4 62.92,93.37 ; BNC21.4 61.72,94.56 ; BNC2.2 23.44,36.17 ; BNC2.2 23.44,33.78 ; BNC2.2 22.25,34.98 ; BNC2.2 24.64,34.98 ; BNC31.2 92.02,125.07 ; BNC31.2 93.22,123.88 ; BNC31.2 90.83,123.88 ; BNC31.2 92.02,122.68 ; 45.11,52.76 BNC11.2 ; BNC11.2 46.3,51.56 ; BNC11.2 47.5,52.76 ; BNC11.2 46.3,53.95 ; BNC15.4 40.06,131.32 ; BNC15.4 38.86,130.12 ; BNC15.4 40.06,128.93 ; BNC15.4 41.25,130.12 ; 67.97,147.9 BNC24.1 ; BNC24.1 69.16,149.1 ; BNC24.1 70.36,147.9 ; BNC24.1 69.16,146.71 ; BNC8.4 17.2,149.1 ; BNC8.4 18.39,147.9 ; BNC8.4 17.2,146.71 ; BNC8.4 16,147.9 ; BNC8.2 24.64,141.66 ; BNC8.2 23.44,142.85 ; BNC8.2 23.44,140.46 ; BNC8.2 22.25,141.66 ; BNC23.2 70.36,123.88 ; BNC23.2 69.16,122.68 ; BNC23.2 67.97,123.88 ; BNC23.2 69.16,125.07 ; BNC29.2 93.22,88.32 ; BNC29.2 92.02,87.12 ; BNC29.2 92.02,89.51 ; BNC29.2 90.83,88.32 ; 84.58,23.44 BNC25.4 ; BNC25.4 85.78,22.25 ; BNC25.4 86.97,23.44 ; BNC25.4 85.78,24.64 ; BNC11.1 46.3,60.2 ; BNC11.1 47.5,59 ; BNC11.1 45.11,59 ; BNC11.1 46.3,57.81 ; 22.25,94.56 BNC5.1 ; BNC5.1 23.44,95.76 ; BNC5.1 23.44,93.37 ; BNC5.1 24.64,94.56 ; 84.58,76.78 BNC28.4 ; BNC28.4 86.97,76.78 ; BNC28.4 85.78,77.98 ; BNC28.4 85.78,75.59 ; 61.72,76.78 BNC20.4 ; BNC20.4 64.11,76.78 ; BNC20.4 62.92,75.59 ; BNC20.4 62.92,77.98 ; J3.3 69.72,7.94 ; J3.3 69.72,5.93 ; J3.3 70.73,6.93 ; J3.3 68.71,6.93 ; 61.72,88.32 BNC21.3 ; BNC21.3 62.92,89.51 ; BNC21.3 64.11,88.32 ; BNC21.3 62.92,87.12 ; BNC10.4 41.25,41.22 ; BNC10.4 38.86,41.22 ; BNC10.4 40.06,40.03 ; BNC10.4 40.06,42.42 ; BNC5.2 24.64,88.32 ; BNC5.2 22.25,88.32 ; BNC5.2 23.44,87.12 ; BNC5.2 23.44,89.51 ; BNC14.1 47.5,112.34 ; BNC14.1 46.3,111.15 ; BNC14.1 46.3,113.54 ; BNC14.1 45.11,112.34 ; BNC30.3 86.97,106.1 ; BNC30.3 84.58,106.1 ; BNC30.3 85.78,104.9 ; BNC30.3 85.78,107.29 ; BNC21.1 69.16,95.76 ; BNC21.1 69.16,93.37 ; BNC21.1 70.36,94.56 ; BNC21.1 67.97,94.56 ; BNC17.1 70.36,23.44 ; BNC17.1 69.16,24.64 ; BNC17.1 67.97,23.44 ; BNC17.1 69.16,22.25 ; BNC11.4 41.25,59 ; BNC11.4 40.06,57.81 ; BNC11.4 40.06,60.2 ; BNC11.4 38.86,59 ; BNC27.3 86.97,52.76 ; BNC27.3 84.58,52.76 ; BNC27.3 85.78,51.56 ; BNC27.3 85.78,53.95 ; 46.3,140.46 BNC16.2 ; BNC16.2 47.5,141.66 ; BNC16.2 45.11,141.66 ; BNC16.2 46.3,142.85 ; BNC32.1 92.02,149.1 ; BNC32.1 93.22,147.9 ; BNC32.1 92.02,146.71 ; BNC32.1 90.83,147.9 ; BNC17.2 70.36,17.2 ; BNC17.2 69.16,16 ; BNC17.2 69.16,18.39 ; BNC17.2 67.97,17.2 ; BNC9.4 40.06,24.64 ; BNC9.4 38.86,23.44 ; BNC9.4 41.25,23.44 ; BNC9.4 40.06,22.25 ; BNC27.1 92.02,60.2 ; BNC27.1 92.02,57.81 ; BNC27.1 90.83,59 ; BNC27.1 93.22,59 ; 16,76.78 BNC4.4 ; BNC4.4 18.39,76.78 ; BNC4.4 17.2,77.98 ; BNC4.4 17.2,75.59 ; 17.2,57.81 BNC3.4 ; BNC3.4 17.2,60.2 ; BNC3.4 16,59 ; BNC3.4 18.39,59 ; 38.86,141.66 BNC16.3 ; BNC16.3 41.25,141.66 ; BNC16.3 40.06,140.46 ; BNC16.3 40.06,142.85 ; J4.3 93.59,6.93 ; J4.3 92.58,5.93 ; J4.3 92.58,7.94 ; J4.3 91.57,6.93 ; 16,106.1 BNC6.3 ; BNC6.3 17.2,107.29 ; BNC6.3 17.2,104.9 ; BNC6.3 18.39,106.1 ; 67.97,70.54 BNC20.2 ; BNC20.2 69.16,69.34 ; BNC20.2 69.16,71.73 ; BNC20.2 70.36,70.54 ; 67.97,88.32 BNC21.2 ; BNC21.2 69.16,87.12 ; BNC21.2 69.16,89.51 ; BNC21.2 70.36,88.32 ; 67.97,34.98 BNC18.2 ; BNC18.2 69.16,33.78 ; BNC18.2 70.36,34.98 ; BNC18.2 69.16,36.17 ; 69.16,104.9 BNC22.2 ; BNC22.2 69.16,107.29 ; BNC22.2 67.97,106.1 ; BNC22.2 70.36,106.1 ; BNC8.1 24.64,147.9 ; BNC8.1 23.44,146.71 ; BNC8.1 23.44,149.1 ; BNC8.1 22.25,147.9 ; BNC7.1 24.64,130.12 ; BNC7.1 23.44,131.32 ; BNC7.1 23.44,128.93 ; BNC7.1 22.25,130.12 ; BNC28.2 92.02,71.73 ; BNC28.2 92.02,69.34 ; BNC28.2 93.22,70.54 ; BNC28.2 90.83,70.54 ; 46.86,5.93 J2.3 ; J2.3 46.86,7.94 ; J2.3 45.85,6.93 ; J2.3 47.87,6.93 ; 17.2,128.93 BNC7.4 ; BNC7.4 17.2,131.32 ; BNC7.4 16,130.12 ; BNC7.4 18.39,130.12 ; BNC25.3 86.97,17.2 ; BNC25.3 84.58,17.2 ; BNC25.3 85.78,16 ; BNC25.3 85.78,18.39 ; 84.58,70.54 BNC28.3 ; BNC28.3 86.97,70.54 ; BNC28.3 85.78,71.73 ; BNC28.3 85.78,69.34 ; 22.25,106.1 BNC6.2 ; BNC6.2 23.44,107.29 ; BNC6.2 24.64,106.1 ; BNC6.2 23.44,104.9 ; 46.3,16 BNC9.2 ; BNC9.2 47.5,17.2 ; BNC9.2 45.11,17.2 ; BNC9.2 46.3,18.39 ; 46.3,146.71 BNC16.1 ; BNC16.1 47.5,147.9 ; BNC16.1 45.11,147.9 ; BNC16.1 46.3,149.1 ; BNC30.2 93.22,106.1 ; BNC30.2 92.02,107.29 ; BNC30.2 92.02,104.9 ; BNC30.2 90.83,106.1 ; 85.78,128.93 BNC31.4 ; BNC31.4 86.97,130.12 ; BNC31.4 84.58,130.12 ; BNC31.4 85.78,131.32 ; BNC3.1 24.64,59 ; BNC3.1 23.44,57.81 ; BNC3.1 23.44,60.2 ; BNC3.1 22.25,59 ; BNC11.3 41.25,52.76 ; BNC11.3 40.06,51.56 ; BNC11.3 38.86,52.76 ; BNC11.3 40.06,53.95 ; BNC10.1 47.5,41.22 ; BNC10.1 45.11,41.22 ; BNC10.1 46.3,42.42 ; BNC10.1 46.3,40.03 ; BNC18.4 64.11,41.22 ; BNC18.4 62.92,42.42 ; BNC18.4 61.72,41.22 ; BNC18.4 62.92,40.03 ; BNC4.1 24.64,76.78 ; BNC4.1 23.44,77.98 ; BNC4.1 23.44,75.59 ; BNC4.1 22.25,76.78 ; 24,3.39 J1.4 ; J1.4 22.99,4.39 ; J1.4 24,5.4 ; J1.4 25.01,4.39 ; BNC31.3 86.97,123.88 ; BNC31.3 85.78,122.68 ; BNC31.3 85.78,125.07 ; BNC31.3 84.58,123.88 ; 40.06,146.71 BNC16.4 ; BNC16.4 40.06,149.1 ; BNC16.4 41.25,147.9 ; BNC16.4 38.86,147.9 ; 61.72,141.66 BNC24.3 ; BNC24.3 62.92,140.46 ; BNC24.3 62.92,142.85 ; BNC24.3 64.11,141.66 ; 46.3,87.12 BNC13.2 ; BNC13.2 46.3,89.51 ; BNC13.2 45.11,88.32 ; BNC13.2 47.5,88.32 ; 90.83,112.34 BNC30.1 ; BNC30.1 92.02,113.54 ; BNC30.1 93.22,112.34 ; BNC30.1 92.02,111.15 ; J4.4 93.59,4.39 ; J4.4 92.58,5.4 ; J4.4 91.57,4.39 ; J4.4 92.58,3.39 ; BNC32.3 86.97,141.66 ; BNC32.3 85.78,140.46 ; BNC32.3 85.78,142.85 ; BNC32.3 84.58,141.66 ; BNC27.4 85.78,60.2 ; BNC27.4 84.58,59 ; BNC27.4 86.97,59 ; BNC27.4 85.78,57.81 ; 16,123.88 BNC7.3 ; BNC7.3 17.2,122.68 ; BNC7.3 18.39,123.88 ; BNC7.3 17.2,125.07 ; 17.2,22.25 BNC1.4 ; BNC1.4 17.2,24.64 ; BNC1.4 16,23.44 ; BNC1.4 18.39,23.44 ; J3.4 69.72,5.4 ; J3.4 68.71,4.39 ; J3.4 70.73,4.39 ; J3.4 69.72,3.39 ; BNC13.1 46.3,95.76 ; BNC13.1 45.11,94.56 ; BNC13.1 46.3,93.37 ; BNC13.1 47.5,94.56 ; 46.3,122.68 BNC15.2 ; BNC15.2 46.3,125.07 ; BNC15.2 45.11,123.88 ; BNC15.2 47.5,123.88 ; 17.2,40.03 BNC2.4 ; BNC2.4 16,41.22 ; BNC2.4 17.2,42.42 ; BNC2.4 18.39,41.22 ; 61.72,130.12 BNC23.4 ; BNC23.4 62.92,128.93 ; BNC23.4 62.92,131.32 ; BNC23.4 64.11,130.12 ; BNC25.2 93.22,17.2 ; BNC25.2 92.02,18.39 ; BNC25.2 92.02,16 ; BNC25.2 90.83,17.2 ; BNC13.3 40.06,89.51 ; BNC13.3 38.86,88.32 ; BNC13.3 41.25,88.32 ; BNC13.3 40.06,87.12 ; 16,52.76 BNC3.3 ; BNC3.3 18.39,52.76 ; BNC3.3 17.2,53.95 ; BNC3.3 17.2,51.56 ; 16,112.34 BNC6.4 ; BNC6.4 17.2,111.15 ; BNC6.4 17.2,113.54 ; BNC6.4 18.39,112.34 ; BNC26.1 92.02,42.42 ; BNC26.1 90.83,41.22 ; BNC26.1 93.22,41.22 ; BNC26.1 92.02,40.03 ; 67.97,59 BNC19.1 ; BNC19.1 69.16,57.81 ; BNC19.1 69.16,60.2 ; BNC19.1 70.36,59 ; BNC5.4 17.2,95.76 ; BNC5.4 18.39,94.56 ; BNC5.4 16,94.56 ; BNC5.4 17.2,93.37 ; 61.72,70.54 BNC20.3 ; BNC20.3 64.11,70.54 ; BNC20.3 62.92,69.34 ; BNC20.3 62.92,71.73 ; BNC19.4 62.92,60.2 ; BNC19.4 64.11,59 ; BNC19.4 62.92,57.81 ; BNC19.4 61.72,59 ; 92.02,93.37 BNC29.1 ; BNC29.1 90.83,94.56 ; BNC29.1 92.02,95.76 ; BNC29.1 93.22,94.56 ; BNC31.1 92.02,131.32 ; BNC31.1 92.02,128.93 ; BNC31.1 90.83,130.12 ; BNC31.1 93.22,130.12 ; BNC26.3 85.78,36.17 ; BNC26.3 84.58,34.98 ; BNC26.3 85.78,33.78 ; BNC26.3 86.97,34.98 ; BNC18.3 64.11,34.98 ; BNC18.3 62.92,33.78 ; BNC18.3 61.72,34.98 ; BNC18.3 62.92,36.17 ; BNC12.4 41.25,76.78 ; BNC12.4 40.06,77.98 ; BNC12.4 40.06,75.59 ; BNC12.4 38.86,76.78 ; 90.83,141.66 BNC32.2 ; BNC32.2 92.02,142.85 ; BNC32.2 93.22,141.66 ; BNC32.2 92.02,140.46 ; 45.11,76.78 BNC12.1 ; BNC12.1 46.3,75.59 ; BNC12.1 47.5,76.78 ; BNC12.1 46.3,77.98 ; BNC9.3 41.25,17.2 ; BNC9.3 38.86,17.2 ; BNC9.3 40.06,16 ; BNC9.3 40.06,18.39 ; BNC13.4 40.06,95.76 ; BNC13.4 40.06,93.37 ; BNC13.4 41.25,94.56 ; BNC13.4 38.86,94.56 ; BNC23.1 69.16,131.32 ; BNC23.1 67.97,130.12 ; BNC23.1 69.16,128.93 ; BNC23.1 70.36,130.12 ; BNC26.4 86.97,41.22 ; BNC26.4 85.78,42.42 ; BNC26.4 84.58,41.22 ; BNC26.4 85.78,40.03 ; 62.92,122.68 BNC23.3 ; BNC23.3 62.92,125.07 ; BNC23.3 61.72,123.88 ; BNC23.3 64.11,123.88 ; BNC8.3 17.2,142.85 ; BNC8.3 18.39,141.66 ; BNC8.3 17.2,140.46 ; BNC8.3 16,141.66 ; BNC32.4 85.78,149.1 ; BNC32.4 86.97,147.9 ; BNC32.4 84.58,147.9 ; BNC32.4 85.78,146.71
  BOTTOM w0.145: BNC27.4 85.78,60.2 ; BNC27.4 86.97,59 ; BNC27.4 84.58,59 ; BNC27.4 85.78,57.81 ; R20.1 55.46,7.62 ; R20.1 54.7,6.79 ; R20.1 54.7,8.45 ; R20.1 v1(52.07,7.62) ; 23.44,122.68 BNC7.2 ; BNC7.2 22.25,123.88 ; BNC7.2 24.64,123.88 ; BNC7.2 23.44,125.07 ; BNC30.3 86.97,106.1 ; BNC30.3 85.78,104.9 ; BNC30.3 85.78,107.29 ; BNC30.3 84.58,106.1 ; 40.06,40.03 BNC10.4 ; BNC10.4 41.25,41.22 ; BNC10.4 40.06,42.42 ; BNC10.4 38.86,41.22 ; 8.98,1.91 v1(7.62,1.91) ; 8.98,1.91 8.98,2.74 ; 8.98,1.91 9.74,1.91 ; 8.98,1.91 8.98,1.07 ; 90.83,130.12 BNC31.1 ; BNC31.1 92.02,131.32 ; BNC31.1 92.02,128.93 ; BNC31.1 93.22,130.12 ; 46.86,3.39 J2.4 ; J2.4 46.86,5.4 ; J2.4 47.87,4.39 ; J2.4 45.85,4.39 ; 61.72,94.56 BNC21.4 ; BNC21.4 62.92,95.76 ; BNC21.4 64.11,94.56 ; BNC21.4 62.92,93.37 ; BNC24.2 69.16,142.85 ; BNC24.2 67.97,141.66 ; BNC24.2 69.16,140.46 ; BNC24.2 70.36,141.66 ; BNC4.3 18.39,70.54 ; BNC4.3 16,70.54 ; BNC4.3 17.2,69.34 ; BNC4.3 17.2,71.73 ; R22.1 71.03,2.74 ; R22.1 v1(72.39,1.91) ; R22.1 71.03,1.07 ; R22.1 70.27,1.91 ; BNC3.3 18.39,52.76 ; BNC3.3 16,52.76 ; BNC3.3 17.2,53.95 ; BNC3.3 17.2,51.56 ; BNC30.4 86.97,112.34 ; BNC30.4 85.78,113.54 ; BNC30.4 85.78,111.15 ; BNC30.4 84.58,112.34 ; BNC29.4 86.97,94.56 ; BNC29.4 84.58,94.56 ; BNC29.4 85.78,95.76 ; BNC29.4 85.78,93.37 ; BNC8.3 17.2,142.85 ; BNC8.3 17.2,140.46 ; BNC8.3 18.39,141.66 ; BNC8.3 16,141.66 ; R18.1 55.46,5.71 ; R18.1 54.7,4.88 ; R18.1 v1(52.07,5.71) ; R18.1 54.7,6.55 ; 46.3,104.9 BNC14.2 ; BNC14.2 47.5,106.1 ; BNC14.2 45.11,106.1 ; BNC14.2 46.3,107.29 ; BNC2.1 24.64,41.22 ; BNC2.1 23.44,40.03 ; BNC2.1 23.44,42.42 ; BNC2.1 22.25,41.22 ; R10.1 32.6,5.71 ; R10.1 31.84,6.55 ; R10.1 31.84,4.88 ; R10.1 v1(29.21,5.71) ; BNC19.3 64.11,52.76 ; BNC19.3 61.72,52.76 ; BNC19.3 62.92,51.56 ; BNC19.3 62.92,53.95 ; BNC12.4 40.06,77.98 ; BNC12.4 40.06,75.59 ; BNC12.4 38.86,76.78 ; BNC12.4 41.25,76.78 ; 67.97,70.54 BNC20.2 ; BNC20.2 69.16,71.73 ; BNC20.2 69.16,69.34 ; BNC20.2 70.36,70.54 ; BNC17.4 64.11,23.44 ; BNC17.4 61.72,23.44 ; BNC17.4 62.92,24.64 ; BNC17.4 62.92,22.25 ; BNC25.4 85.78,24.64 ; BNC25.4 85.78,22.25 ; BNC25.4 84.58,23.44 ; BNC25.4 86.97,23.44 ; BNC32.2 93.22,141.66 ; BNC32.2 92.02,142.85 ; BNC32.2 90.83,141.66 ; BNC32.2 92.02,140.46 ; 62.92,146.71 BNC24.4 ; BNC24.4 61.72,147.9 ; BNC24.4 62.92,149.1 ; BNC24.4 64.11,147.9 ; BNC13.3 40.06,89.51 ; BNC13.3 41.25,88.32 ; BNC13.3 38.86,88.32 ; BNC13.3 40.06,87.12 ; 84.58,147.9 BNC32.4 ; BNC32.4 85.78,146.71 ; BNC32.4 86.97,147.9 ; BNC32.4 85.78,149.1 ; 16,88.32 BNC5.3 ; BNC5.3 17.2,87.12 ; BNC5.3 17.2,89.51 ; BNC5.3 18.39,88.32 ; R25.1 v1(74.93,3.81) ; R25.1 77.56,2.98 ; R25.1 77.56,4.64 ; R25.1 78.32,3.81 ; BNC28.4 85.78,77.98 ; BNC28.4 85.78,75.59 ; BNC28.4 84.58,76.78 ; BNC28.4 86.97,76.78 ; 17.2,33.78 BNC2.3 ; BNC2.3 16,34.98 ; BNC2.3 18.39,34.98 ; BNC2.3 17.2,36.17 ; BNC24.1 70.36,147.9 ; BNC24.1 67.97,147.9 ; BNC24.1 69.16,149.1 ; BNC24.1 69.16,146.71 ; BNC23.1 70.36,130.12 ; BNC23.1 69.16,128.93 ; BNC23.1 69.16,131.32 ; BNC23.1 67.97,130.12 ; 92.02,93.37 BNC29.1 ; BNC29.1 92.02,95.76 ; BNC29.1 93.22,94.56 ; BNC29.1 90.83,94.56 ; R1.1 9.74,3.81 ; R1.1 v1(6.35,3.81) ; R1.1 8.98,4.64 ; R1.1 8.98,2.98 ; BNC3.4 18.39,59 ; BNC3.4 16,59 ; BNC3.4 17.2,60.2 ; BNC3.4 17.2,57.81 ; BNC29.2 93.22,88.32 ; BNC29.2 92.02,89.51 ; BNC29.2 92.02,87.12 ; BNC29.2 90.83,88.32 ; 16,130.12 BNC7.4 ; BNC7.4 17.2,128.93 ; BNC7.4 18.39,130.12 ; BNC7.4 17.2,131.32 ; R16.1 50.08,11.63 ; R16.1 50.08,9.96 ; R16.1 49.32,10.79 ; R16.1 v1(52.7,10.79) ; BNC25.3 86.97,17.2 ; BNC25.3 84.58,17.2 ; BNC25.3 85.78,18.39 ; BNC25.3 85.78,16 ; 90.83,106.1 BNC30.2 ; BNC30.2 93.22,106.1 ; BNC30.2 92.02,107.29 ; BNC30.2 92.02,104.9 ; 61.72,123.88 BNC23.3 ; BNC23.3 62.92,122.68 ; BNC23.3 64.11,123.88 ; BNC23.3 62.92,125.07 ; J3.3 70.73,6.93 ; J3.3 69.72,7.94 ; J3.3 69.72,5.93 ; 65.32,1.07 R21.1 ; R21.1 v1(66.67,1.91) ; R21.1 65.32,2.74 ; R21.1 64.56,1.91 ; R24.1 v1(75.56,10.79) ; R24.1 72.94,11.63 ; R24.1 72.94,9.96 ; R24.1 72.18,10.79 ; BNC13.4 40.06,95.76 ; BNC13.4 40.06,93.37 ; BNC13.4 41.25,94.56 ; BNC13.4 38.86,94.56 ; BNC22.2 69.16,107.29 ; BNC22.2 69.16,104.9 ; BNC22.2 67.97,106.1 ; BNC22.2 70.36,106.1 ; BNC22.4 62.92,113.54 ; BNC22.4 64.11,112.34 ; BNC22.4 61.72,112.34 ; BNC22.4 62.92,111.15 ; BNC26.4 86.97,41.22 ; BNC26.4 84.58,41.22 ; BNC26.4 85.78,40.03 ; BNC26.4 85.78,42.42 ; 8.98,6.79 R4.1 ; R4.1 8.98,8.45 ; R4.1 9.74,7.62 ; R4.1 v1(6.35,7.62) ; 54.7,1.91 v1(53.34,1.91) ; 54.7,1.91 54.7,2.74 ; 54.7,1.91 54.7,1.07 ; 54.7,1.91 55.46,1.91 ; 85.78,33.78 BNC26.3 ; BNC26.3 86.97,34.98 ; BNC26.3 85.78,36.17 ; BNC26.3 84.58,34.98 ; J4.4 93.59,4.39 ; J4.4 92.58,3.39 ; J4.4 91.57,4.39 ; J4.4 92.58,5.4 ; 62.92,75.59 BNC20.4 ; BNC20.4 61.72,76.78 ; BNC20.4 62.92,77.98 ; BNC20.4 64.11,76.78 ; BNC4.1 24.64,76.78 ; BNC4.1 23.44,75.59 ; BNC4.1 23.44,77.98 ; BNC4.1 22.25,76.78 ; BNC19.2 69.16,53.95 ; BNC19.2 69.16,51.56 ; BNC19.2 70.36,52.76 ; BNC19.2 67.97,52.76 ; R2.1 8.98,6.55 ; R2.1 9.74,5.71 ; R2.1 8.98,4.88 ; R2.1 v1(6.35,5.71) ; 19.6,1.07 R5.1 ; R5.1 18.84,1.91 ; R5.1 19.6,2.74 ; R5.1 v1(20.95,1.91) ; 77.56,1.91 v1(76.2,1.91) ; 77.56,1.91 77.56,1.07 ; 77.56,1.91 77.56,2.74 ; 77.56,1.91 78.32,1.91 ; R9.1 32.6,3.81 ; R9.1 v1(29.21,3.81) ; R9.1 31.84,4.64 ; R9.1 31.84,2.98 ; J4.3 93.59,6.93 ; J4.3 92.58,7.94 ; J4.3 92.58,5.93 ; 24,5.93 J1.3 ; J1.3 25.01,6.93 ; J1.3 24,7.94 ; J2.3 47.87,6.93 ; J2.3 46.86,5.93 ; J2.3 46.86,7.94 ; 23.44,87.12 BNC5.2 ; BNC5.2 23.44,89.51 ; BNC5.2 22.25,88.32 ; BNC5.2 24.64,88.32 ; BNC26.1 93.22,41.22 ; BNC26.1 92.02,40.03 ; BNC26.1 92.02,42.42 ; BNC26.1 90.83,41.22 ; BNC27.2 92.02,53.95 ; BNC27.2 90.83,52.76 ; BNC27.2 92.02,51.56 ; BNC27.2 93.22,52.76 ; BNC11.2 47.5,52.76 ; BNC11.2 45.11,52.76 ; BNC11.2 46.3,51.56 ; BNC11.2 46.3,53.95 ; 38.86,141.66 BNC16.3 ; BNC16.3 40.06,140.46 ; BNC16.3 40.06,142.85 ; BNC16.3 41.25,141.66 ; 92.02,122.68 BNC31.2 ; BNC31.2 90.83,123.88 ; BNC31.2 93.22,123.88 ; BNC31.2 92.02,125.07 ; 67.97,123.88 BNC23.2 ; BNC23.2 69.16,122.68 ; BNC23.2 70.36,123.88 ; BNC23.2 69.16,125.07 ; 46.3,75.59 BNC12.1 ; BNC12.1 45.11,76.78 ; BNC12.1 46.3,77.98 ; BNC12.1 47.5,76.78 ; 46.3,16 BNC9.2 ; BNC9.2 45.11,17.2 ; BNC9.2 47.5,17.2 ; BNC9.2 46.3,18.39 ; R29.1 88.18,2.74 ; R29.1 88.18,1.07 ; R29.1 v1(89.53,1.91) ; R29.1 87.42,1.91 ; BNC17.2 70.36,17.2 ; BNC17.2 69.16,18.39 ; BNC17.2 67.97,17.2 ; BNC17.2 69.16,16 ; 46.3,57.81 BNC11.1 ; BNC11.1 45.11,59 ; BNC11.1 46.3,60.2 ; BNC11.1 47.5,59 ; 40.06,22.25 BNC9.4 ; BNC9.4 41.25,23.44 ; BNC9.4 40.06,24.64 ; BNC9.4 38.86,23.44 ; BNC16.4 41.25,147.9 ; BNC16.4 40.06,146.71 ; BNC16.4 38.86,147.9 ; BNC16.4 40.06,149.1 ; 45.11,147.9 BNC16.1 ; BNC16.1 46.3,146.71 ; BNC16.1 46.3,149.1 ; BNC16.1 47.5,147.9 ; BNC11.3 40.06,53.95 ; BNC11.3 38.86,52.76 ; BNC11.3 40.06,51.56 ; BNC11.3 41.25,52.76 ; 69.16,33.78 BNC18.2 ; BNC18.2 70.36,34.98 ; BNC18.2 69.16,36.17 ; BNC18.2 67.97,34.98 ; 84.58,70.54 BNC28.3 ; BNC28.3 85.78,71.73 ; BNC28.3 86.97,70.54 ; BNC28.3 85.78,69.34 ; 45.11,41.22 BNC10.1 ; BNC10.1 46.3,40.03 ; BNC10.1 47.5,41.22 ; BNC10.1 46.3,42.42 ; BNC3.1 24.64,59 ; BNC3.1 23.44,57.81 ; BNC3.1 23.44,60.2 ; BNC3.1 22.25,59 ; 45.11,141.66 BNC16.2 ; BNC16.2 46.3,142.85 ; BNC16.2 47.5,141.66 ; BNC16.2 46.3,140.46 ; BNC22.1 70.36,112.34 ; BNC22.1 69.16,113.54 ; BNC22.1 69.16,111.15 ; BNC22.1 67.97,112.34 ; 62.92,140.46 BNC24.3 ; BNC24.3 61.72,141.66 ; BNC24.3 62.92,142.85 ; BNC24.3 64.11,141.66 ; BNC8.2 24.64,141.66 ; BNC8.2 23.44,140.46 ; BNC8.2 22.25,141.66 ; BNC8.2 23.44,142.85 ; BNC27.1 93.22,59 ; BNC27.1 92.02,60.2 ; BNC27.1 90.83,59 ; BNC27.1 92.02,57.81 ; J1.4 24,5.4 ; J1.4 25.01,4.39 ; J1.4 22.99,4.39 ; J1.4 24,3.39 ; 62.92,33.78 BNC18.3 ; BNC18.3 64.11,34.98 ; BNC18.3 62.92,36.17 ; BNC18.3 61.72,34.98 ; 46.3,33.78 BNC10.2 ; BNC10.2 46.3,36.17 ; BNC10.2 45.11,34.98 ; BNC10.2 47.5,34.98 ; 54.7,2.98 R17.1 ; R17.1 54.7,4.64 ; R17.1 55.46,3.81 ; R17.1 v1(52.07,3.81) ; R26.1 77.56,6.55 ; R26.1 78.32,5.71 ; R26.1 77.56,4.88 ; R26.1 v1(74.93,5.71) ; BNC22.3 62.92,107.29 ; BNC22.3 64.11,106.1 ; BNC22.3 62.92,104.9 ; BNC22.3 61.72,106.1 ; BNC25.1 93.22,23.44 ; BNC25.1 92.02,24.64 ; BNC25.1 90.83,23.44 ; BNC25.1 92.02,22.25 ; 84.58,52.76 BNC27.3 ; BNC27.3 85.78,53.95 ; BNC27.3 86.97,52.76 ; BNC27.3 85.78,51.56 ; BNC8.1 24.64,147.9 ; BNC8.1 23.44,146.71 ; BNC8.1 22.25,147.9 ; BNC8.1 23.44,149.1 ; 16,23.44 BNC1.4 ; BNC1.4 18.39,23.44 ; BNC1.4 17.2,24.64 ; BNC1.4 17.2,22.25 ; R31.1 v1(97.16,8.89) ; R31.1 95.8,8.06 ; R31.1 95.04,8.89 ; R31.1 95.8,9.72 ; 16,112.34 BNC6.4 ; BNC6.4 17.2,111.15 ; BNC6.4 17.2,113.54 ; BNC6.4 18.39,112.34 ; BNC15.1 47.5,130.12 ; BNC15.1 46.3,128.93 ; BNC15.1 45.11,130.12 ; BNC15.1 46.3,131.32 ; 46.3,111.15 BNC14.1 ; BNC14.1 46.3,113.54 ; BNC14.1 45.11,112.34 ; BNC14.1 47.5,112.34 ; 45.11,23.44 BNC9.1 ; BNC9.1 47.5,23.44 ; BNC9.1 46.3,24.64 ; BNC9.1 46.3,22.25 ; BNC1.3 17.2,18.39 ; BNC1.3 16,17.2 ; BNC1.3 18.39,17.2 ; BNC1.3 17.2,16 ; BNC14.4 41.25,112.34 ; BNC14.4 40.06,113.54 ; BNC14.4 38.86,112.34 ; BNC14.4 40.06,111.15 ; BNC30.1 92.02,113.54 ; BNC30.1 92.02,111.15 ; BNC30.1 93.22,112.34 ; BNC30.1 90.83,112.34 ; BNC23.4 62.92,131.32 ; BNC23.4 61.72,130.12 ; BNC23.4 64.11,130.12 ; BNC23.4 62.92,128.93 ; 40.06,57.81 BNC11.4 ; BNC11.4 41.25,59 ; BNC11.4 40.06,60.2 ; BNC11.4 38.86,59 ; 61.72,41.22 BNC18.4 ; BNC18.4 62.92,40.03 ; BNC18.4 64.11,41.22 ; BNC18.4 62.92,42.42 ; BNC2.4 17.2,42.42 ; BNC2.4 16,41.22 ; BNC2.4 18.39,41.22 ; BNC2.4 17.2,40.03 ; 69.16,40.03 BNC18.1 ; BNC18.1 67.97,41.22 ; BNC18.1 69.16,42.42 ; BNC18.1 70.36,41.22 ; R13.1 v1(43.81,1.91) ; R13.1 41.7,1.91 ; R13.1 42.46,2.74 ; R13.1 42.46,1.07 ; 61.72,59 BNC19.4 ; BNC19.4 62.92,60.2 ; BNC19.4 62.92,57.81 ; BNC19.4 64.11,59 ; 22.25,130.12 BNC7.1 ; BNC7.1 23.44,131.32 ; BNC7.1 23.44,128.93 ; BNC7.1 24.64,130.12 ; BNC25.2 93.22,17.2 ; BNC25.2 92.02,16 ; BNC25.2 92.02,18.39 ; BNC25.2 90.83,17.2 ; 48.17,1.07 R14.1 ; R14.1 48.17,2.74 ; R14.1 47.41,1.91 ; R14.1 v1(49.53,1.91) ; 38.86,34.98 BNC10.3 ; BNC10.3 40.06,33.78 ; BNC10.3 40.06,36.17 ; BNC10.3 41.25,34.98 ; BNC15.3 40.06,125.07 ; BNC15.3 41.25,123.88 ; BNC15.3 40.06,122.68 ; BNC15.3 38.86,123.88 ; R8.1 v1(29.84,10.79) ; R8.1 27.22,9.96 ; R8.1 27.22,11.63 ; R8.1 26.46,10.79 ; 72.18,8.89 R23.1 ; R23.1 72.94,8.06 ; R23.1 v1(74.3,8.89) ; R23.1 72.94,9.72 ; BNC8.4 18.39,147.9 ; BNC8.4 17.2,146.71 ; BNC8.4 16,147.9 ; BNC8.4 17.2,149.1 ; 23.44,22.25 BNC1.1 ; BNC1.1 22.25,23.44 ; BNC1.1 23.44,24.64 ; BNC1.1 24.64,23.44 ; 40.06,16 BNC9.3 ; BNC9.3 41.25,17.2 ; BNC9.3 40.06,18.39 ; BNC9.3 38.86,17.2 ; 62.92,87.12 BNC21.3 ; BNC21.3 61.72,88.32 ; BNC21.3 64.11,88.32 ; BNC21.3 62.92,89.51 ; BNC4.2 24.64,70.54 ; BNC4.2 23.44,71.73 ; BNC4.2 23.44,69.34 ; BNC4.2 22.25,70.54 ; 77.56,6.79 R28.1 ; R28.1 78.32,7.62 ; R28.1 77.56,8.45 ; R28.1 v1(74.93,7.62) ; 84.58,88.32 BNC29.3 ; BNC29.3 85.78,89.51 ; BNC29.3 86.97,88.32 ; BNC29.3 85.78,87.12 ; 67.97,59 BNC19.1 ; BNC19.1 70.36,59 ; BNC19.1 69.16,60.2 ; BNC19.1 69.16,57.81 ; 45.11,123.88 BNC15.2 ; BNC15.2 46.3,125.07 ; BNC15.2 47.5,123.88 ; BNC15.2 46.3,122.68 ; BNC28.1 92.02,77.98 ; BNC28.1 93.22,76.78 ; BNC28.1 92.02,75.59 ; BNC28.1 90.83,76.78 ; 40.06,104.9 BNC14.3 ; BNC14.3 40.06,107.29 ; BNC14.3 41.25,106.1 ; BNC14.3 38.86,106.1 ; R12.1 31.84,8.45 ; R12.1 32.6,7.62 ; R12.1 v1(29.21,7.62) ; R12.1 31.84,6.79 ; 92.02,146.71 BNC32.1 ; BNC32.1 93.22,147.9 ; BNC32.1 92.02,149.1 ; BNC32.1 90.83,147.9 ; 17.2,104.9 BNC6.3 ; BNC6.3 16,106.1 ; BNC6.3 18.39,106.1 ; BNC6.3 17.2,107.29 ; BNC13.2 46.3,89.51 ; BNC13.2 47.5,88.32 ; BNC13.2 45.11,88.32 ; BNC13.2 46.3,87.12 ; BNC3.2 24.64,52.76 ; BNC3.2 22.25,52.76 ; BNC3.2 23.44,51.56 ; BNC3.2 23.44,53.95 ; 40.06,128.93 BNC15.4 ; BNC15.4 38.86,130.12 ; BNC15.4 41.25,130.12 ; BNC15.4 40.06,131.32 ; 22.25,112.34 BNC6.1 ; BNC6.1 23.44,113.54 ; BNC6.1 23.44,111.15 ; BNC6.1 24.64,112.34 ; 67.97,76.78 BNC20.1 ; BNC20.1 70.36,76.78 ; BNC20.1 69.16,75.59 ; BNC20.1 69.16,77.98 ; 22.25,34.98 BNC2.2 ; BNC2.2 24.64,34.98 ; BNC2.2 23.44,33.78 ; BNC2.2 23.44,36.17 ; 85.78,122.68 BNC31.3 ; BNC31.3 85.78,125.07 ; BNC31.3 84.58,123.88 ; BNC31.3 86.97,123.88 ; 50.08,8.06 R15.1 ; R15.1 49.32,8.89 ; R15.1 v1(51.44,8.89) ; R15.1 50.08,9.72 ; 22.25,94.56 BNC5.1 ; BNC5.1 24.64,94.56 ; BNC5.1 23.44,95.76 ; BNC5.1 23.44,93.37 ; BNC32.3 86.97,141.66 ; BNC32.3 85.78,140.46 ; BNC32.3 85.78,142.85 ; BNC32.3 84.58,141.66 ; BNC26.2 93.22,34.98 ; BNC26.2 92.02,36.17 ; BNC26.2 92.02,33.78 ; BNC26.2 90.83,34.98 ; BNC4.4 18.39,76.78 ; BNC4.4 17.2,77.98 ; BNC4.4 17.2,75.59 ; BNC4.4 16,76.78 ; BNC31.4 86.97,130.12 ; BNC31.4 85.78,128.93 ; BNC31.4 85.78,131.32 ; BNC31.4 84.58,130.12 ; BNC1.2 24.64,17.2 ; BNC1.2 22.25,17.2 ; BNC1.2 23.44,16 ; BNC1.2 23.44,18.39 ; 38.86,70.54 BNC12.3 ; BNC12.3 40.06,71.73 ; BNC12.3 40.06,69.34 ; BNC12.3 41.25,70.54 ; R30.1 93.89,2.74 ; R30.1 v1(95.25,1.91) ; R30.1 93.13,1.91 ; R30.1 93.89,1.07 ; 27.22,8.06 R7.1 ; R7.1 v1(28.57,8.89) ; R7.1 27.22,9.72 ; R7.1 26.46,8.89 ; 16,94.56 BNC5.4 ; BNC5.4 17.2,95.76 ; BNC5.4 17.2,93.37 ; BNC5.4 18.39,94.56 ; BNC17.1 70.36,23.44 ; BNC17.1 69.16,24.64 ; BNC17.1 69.16,22.25 ; BNC17.1 67.97,23.44 ; BNC12.2 46.3,71.73 ; BNC12.2 45.11,70.54 ; BNC12.2 46.3,69.34 ; BNC12.2 47.5,70.54 ; 67.97,88.32 BNC21.2 ; BNC21.2 70.36,88.32 ; BNC21.2 69.16,89.51 ; BNC21.2 69.16,87.12 ; 25.31,1.07 R6.1 ; R6.1 25.31,2.74 ; R6.1 v1(26.67,1.91) ; R6.1 24.55,1.91 ; 17.2,122.68 BNC7.3 ; BNC7.3 16,123.88 ; BNC7.3 17.2,125.07 ; BNC7.3 18.39,123.88 ; 67.97,94.56 BNC21.1 ; BNC21.1 69.16,95.76 ; BNC21.1 70.36,94.56 ; BNC21.1 69.16,93.37 ; 95.04,10.79 R32.1 ; R32.1 95.8,11.63 ; R32.1 95.8,9.96 ; R32.1 v1(98.42,10.79) ; BNC28.2 93.22,70.54 ; BNC28.2 92.02,69.34 ; BNC28.2 92.02,71.73 ; BNC28.2 90.83,70.54 ; BNC13.1 46.3,95.76 ; BNC13.1 47.5,94.56 ; BNC13.1 46.3,93.37 ; BNC13.1 45.11,94.56 ; 22.25,106.1 BNC6.2 ; BNC6.2 24.64,106.1 ; BNC6.2 23.44,107.29 ; BNC6.2 23.44,104.9 ; 69.72,3.39 J3.4 ; J3.4 69.72,5.4 ; J3.4 70.73,4.39 ; J3.4 68.71,4.39 ; 62.92,16 BNC17.3 ; BNC17.3 64.11,17.2 ; BNC17.3 62.92,18.39 ; BNC17.3 61.72,17.2 ; 61.72,70.54 BNC20.3 ; BNC20.3 64.11,70.54 ; BNC20.3 62.92,71.73 ; BNC20.3 62.92,69.34 ; 31.84,1.91 31.84,2.74 ; 31.84,1.91 v1(30.48,1.91) ; 31.84,1.91 31.84,1.07 ; 31.84,1.91 32.6,1.91
N08480: length 134.1
  TOP w0.127: BNC1.5 20.19,20.32
  SIGNAL w0.112: J1.12 12.06,6.17 12.06,8.26 14.61,10.79 14.61,26.67 14.73,26.8 23.98,26.8 24.1,26.92 24.1,27.18 23.98,27.3 14.73,27.3 14.61,27.43 14.61,27.69 14.73,27.81 23.98,27.81 24.1,27.94 24.1,28.19 23.98,28.32 14.73,28.32 14.61,28.45 14.61,28.7 14.73,28.83 23.98,28.83 24.1,28.96 24.1,29.21 23.98,29.34 14.73,29.34 14.61,29.46 14.61,29.72 14.73,29.84 23.98,29.84 24.1,29.97 24.1,30.23 23.98,30.35 14.73,30.35 14.61,30.48 14.61,31.11 15.88,32.38 24.13,32.38 26.04,30.48 26.04,21.59 24.77,20.32 BNC1.5
  BOTTOM w0.145: R1.2 12.24,3.81 12.83,4.39 J1.12
N08489: length 145.6
  SIGNAL w0.112: BNC2.5 24.13,38.1 26.04,40.01 26.04,48.26 24.13,50.16 17.14,50.16 15.24,52.07 15.24,65.41 15.88,66.04 16.51,66.04 17.14,65.41 17.14,61.59 17.78,60.96 22.86,60.96 24.13,62.23 24.13,66.04 22.86,67.31 13.97,67.31 13.34,66.67 13.34,11.43 10.79,8.89 10.79,5.08 12.7,3.17 15.16,3.17 J1.10
  GND w0.127: BNC2.5 20.19,38.1
  BOTTOM w0.145: J1.10 13.89,1.91 R3.2
N08507: length 160
  SIGNAL w0.112: 20.19,55.88 BNC3.5 24.13,55.88 25.76,57.52 25.76,66.31 23.5,68.58 16.51,68.58 15.24,69.85 15.24,77.47 16.51,78.74 23.5,78.74 24.68,79.93 24.68,82.63 23.38,83.93 12.81,83.93 12.06,83.19 12.06,12.06 9.53,9.53 9.53,4.45 11.43,2.54 16.51,2.54 17.78,3.81 17.78,5.79 J1.7
  BOTTOM w0.145: R5.2 17.23,2.75 17.78,3.29 17.78,5.79 J1.7
N08519: length 151
  SIGNAL w0.112: J1.6 18.34,1.27 10.79,1.27 8.26,3.81 8.26,10.16 10.79,12.7 10.79,93.34 12.06,94.61 13.34,94.61 14.61,93.34 14.61,87 15.88,85.72 24.13,85.72 26.04,83.82 26.04,76.2 23.5,73.66 BNC4.5 20.19,73.66
  BOTTOM w0.145: R7.2 24.13,8.89 22.86,7.62 22.86,5.71 21.54,4.39 J1.6
N08544: length 158.3
  SIGNAL w0.112: BNC5.5 20.32,93.73 16.89,97.16 13.34,97.16 10.79,99.69 10.79,112.39 12.06,113.67 13.97,113.67 15.24,112.39 15.24,105.41 17.14,103.5 24.76,103.5 27.3,100.96 27.3,16.51 23.5,12.7 19.61,12.7 J1.11
  BOTTOM w0.145: R2.2 12.62,5.71 J1.11
N08556: length 184.4
  SIGNAL w0.112: BNC6.5 20.32,111.12 10.79,120.65 10.79,133.99 12.06,135.25 13.34,135.25 14.61,133.99 14.61,123.19 17.78,120.02 26.67,120.02 28.57,118.11 28.57,15.88 24.13,11.43 20.88,11.43 J1.9
  BOTTOM w0.145: J1.9 15.06,8.26 13.34,8.26 12.7,7.62 R4.2
N08588: length 159.3
  SIGNAL w0.112: 20.19,127 BNC7.5 20.32,134.62 21.59,135.89 28.57,135.89 29.84,134.62 29.84,15.24 24.77,10.16 22.86,10.16 20.32,7.62 20.32,5.79 J1.8
  BOTTOM w0.145: R6.2 22.95,1.98 21.75,3.17 20.14,3.17 J1.8
N08600: length 156.6
  SIGNAL w0.112: J1.5 23.42,8.89 25.4,8.89 31.11,14.61 31.11,138.43 24.77,144.78 BNC8.5 20.19,144.78
  BOTTOM w0.145: J1.5 21.46,9.4 22.86,10.79 R8.2
N13592: length 152.8
  TOP w0.127: BNC9.5 43.05,20.32
  SIGNAL w0.112: BNC9.5 47.62,20.32 48.9,21.59 48.9,30.48 46.99,32.38 38.73,32.38 37.47,31.11 37.47,30.48 37.59,30.35 46.84,30.35 46.96,30.23 46.96,29.97 46.84,29.84 37.59,29.84 37.47,29.72 37.47,29.46 37.59,29.34 46.84,29.34 46.96,29.21 46.96,28.96 46.84,28.83 37.59,28.83 37.47,28.7 37.47,28.45 37.59,28.32 46.84,28.32 46.96,28.19 46.96,27.94 46.84,27.81 37.59,27.81 37.47,27.69 37.47,27.43 37.59,27.3 46.84,27.3 46.96,27.18 46.96,26.92 46.84,26.8 37.59,26.8 37.47,26.67 37.47,26.42 37.59,26.29 46.84,26.29 46.96,26.16 46.96,25.91 46.84,25.78 37.59,25.78 37.47,25.65 37.47,10.79 34.92,8.26 34.92,6.17 J2.12
  BOTTOM w0.145: R9.2 35.1,3.81 35.69,4.39 J2.12
N13596: length 156
  SIGNAL w0.112: J2.10 38.02,3.17 35.56,3.17 33.66,5.08 33.66,8.89 36.2,11.43 36.2,42.93 36.32,43.05 43.18,43.05 43.31,43.18 43.31,43.43 43.18,43.56 36.32,43.56 36.2,43.69 36.2,43.94 36.32,44.07 43.18,44.07 43.31,44.2 43.31,44.45 43.18,44.58 36.32,44.58 36.2,44.7 36.2,44.96 36.32,45.09 43.18,45.09 43.31,45.21 43.31,45.47 43.18,45.59 36.32,45.59 36.2,45.72 36.2,45.97 36.32,46.1 43.18,46.1 43.31,46.23 43.31,46.48 43.18,46.61 36.32,46.61 36.2,46.74 36.2,46.99 36.32,47.12 43.18,47.12 43.31,47.24 43.31,47.5 43.18,47.62 36.32,47.62 36.2,47.75 36.2,48.26 38.1,50.16 46.99,50.16 48.9,48.26 48.9,40.01 46.99,38.1 BNC10.5
  GND w0.127: BNC10.5 43.05,38.1
  BOTTOM w0.145: J2.10 36.75,1.91 R11.2
N13604: length 156
  SIGNAL w0.112: 43.05,55.88 BNC11.5 46.99,55.88 48.62,57.52 48.62,66.31 46.99,67.94 36.83,67.94 34.92,66.04 34.92,65.28 35.05,65.15 39.37,65.15 39.5,65.02 39.5,64.77 39.37,64.64 35.05,64.64 34.92,64.52 34.92,64.26 35.05,64.14 39.37,64.14 39.5,64.01 39.5,63.75 39.37,63.63 35.05,63.63 34.92,63.5 34.92,63.25 35.05,63.12 39.37,63.12 39.5,62.99 39.5,62.74 39.37,62.61 35.05,62.61 34.92,62.48 34.92,62.23 35.05,62.1 39.37,62.1 39.5,61.98 39.5,61.72 39.37,61.59 35.05,61.59 34.92,61.47 34.92,61.21 35.05,61.09 39.37,61.09 39.5,60.96 39.5,60.71 39.37,60.58 35.05,60.58 34.92,60.45 34.92,12.06 32.38,9.53 32.38,4.45 34.29,2.54 39.37,2.54 40.64,3.81 40.64,5.79 J2.7
  BOTTOM w0.145: J2.7 40.64,5.79 40.64,3.29 40.09,2.75 R13.2
N13610: length 157.5
  SIGNAL w0.112: 43.05,73.66 BNC12.5 46.35,73.66 48.9,76.2 48.9,83.82 46.99,85.72 35.56,85.72 33.66,83.82 33.66,83.06 33.78,82.93 35.99,82.93 36.12,82.8 36.12,82.55 35.99,82.42 33.78,82.42 33.66,82.3 33.66,82.04 33.78,81.92 35.99,81.92 36.12,81.79 36.12,81.53 35.99,81.41 33.78,81.41 33.66,81.28 33.66,81.03 33.78,80.9 35.99,80.9 36.12,80.77 36.12,80.52 35.99,80.39 33.78,80.39 33.66,80.26 33.66,80.01 33.78,79.88 35.99,79.88 36.12,79.76 36.12,79.5 35.99,79.38 33.78,79.38 33.66,79.25 33.66,78.99 33.78,78.87 35.99,78.87 36.12,78.74 36.12,78.49 35.99,78.36 33.78,78.36 33.66,78.23 33.66,12.7 31.11,10.16 31.11,3.81 33.66,1.27 41.2,1.27 J2.6
  BOTTOM w0.145: R15.2 46.99,8.89 45.72,7.62 45.72,5.71 44.4,4.39 J2.6
N13620: length 157.3
  SIGNAL w0.112: J2.11 42.47,12.7 46.35,12.7 50.16,16.51 50.16,95.25 41.91,103.5 35.56,103.5 33.66,101.6 33.66,101.35 33.78,101.22 35.56,101.22 35.69,101.09 35.69,100.84 35.56,100.71 33.78,100.71 33.66,100.58 33.66,100.33 33.78,100.2 35.56,100.2 35.69,100.08 35.69,99.82 35.56,99.69 33.78,99.69 33.66,99.57 33.66,99.31 33.78,99.19 35.56,99.19 35.69,99.06 35.69,98.81 35.56,98.68 33.78,98.68 33.66,98.55 33.66,98.3 33.78,98.17 35.56,98.17 35.69,98.04 35.69,97.79 35.56,97.66 33.78,97.66 33.66,97.54 33.66,97.28 33.78,97.16 35.56,97.16 35.69,97.03 35.69,96.77 35.56,96.65 33.78,96.65 33.66,96.52 33.66,93.35 35.56,91.44 BNC13.5
  BOTTOM w0.145: R10.2 35.48,5.71 J2.11
